# EAGLE board Graphic_LCD_Backpack_Panel_v16 (EAGLE 7.5.0), part 1 of 4
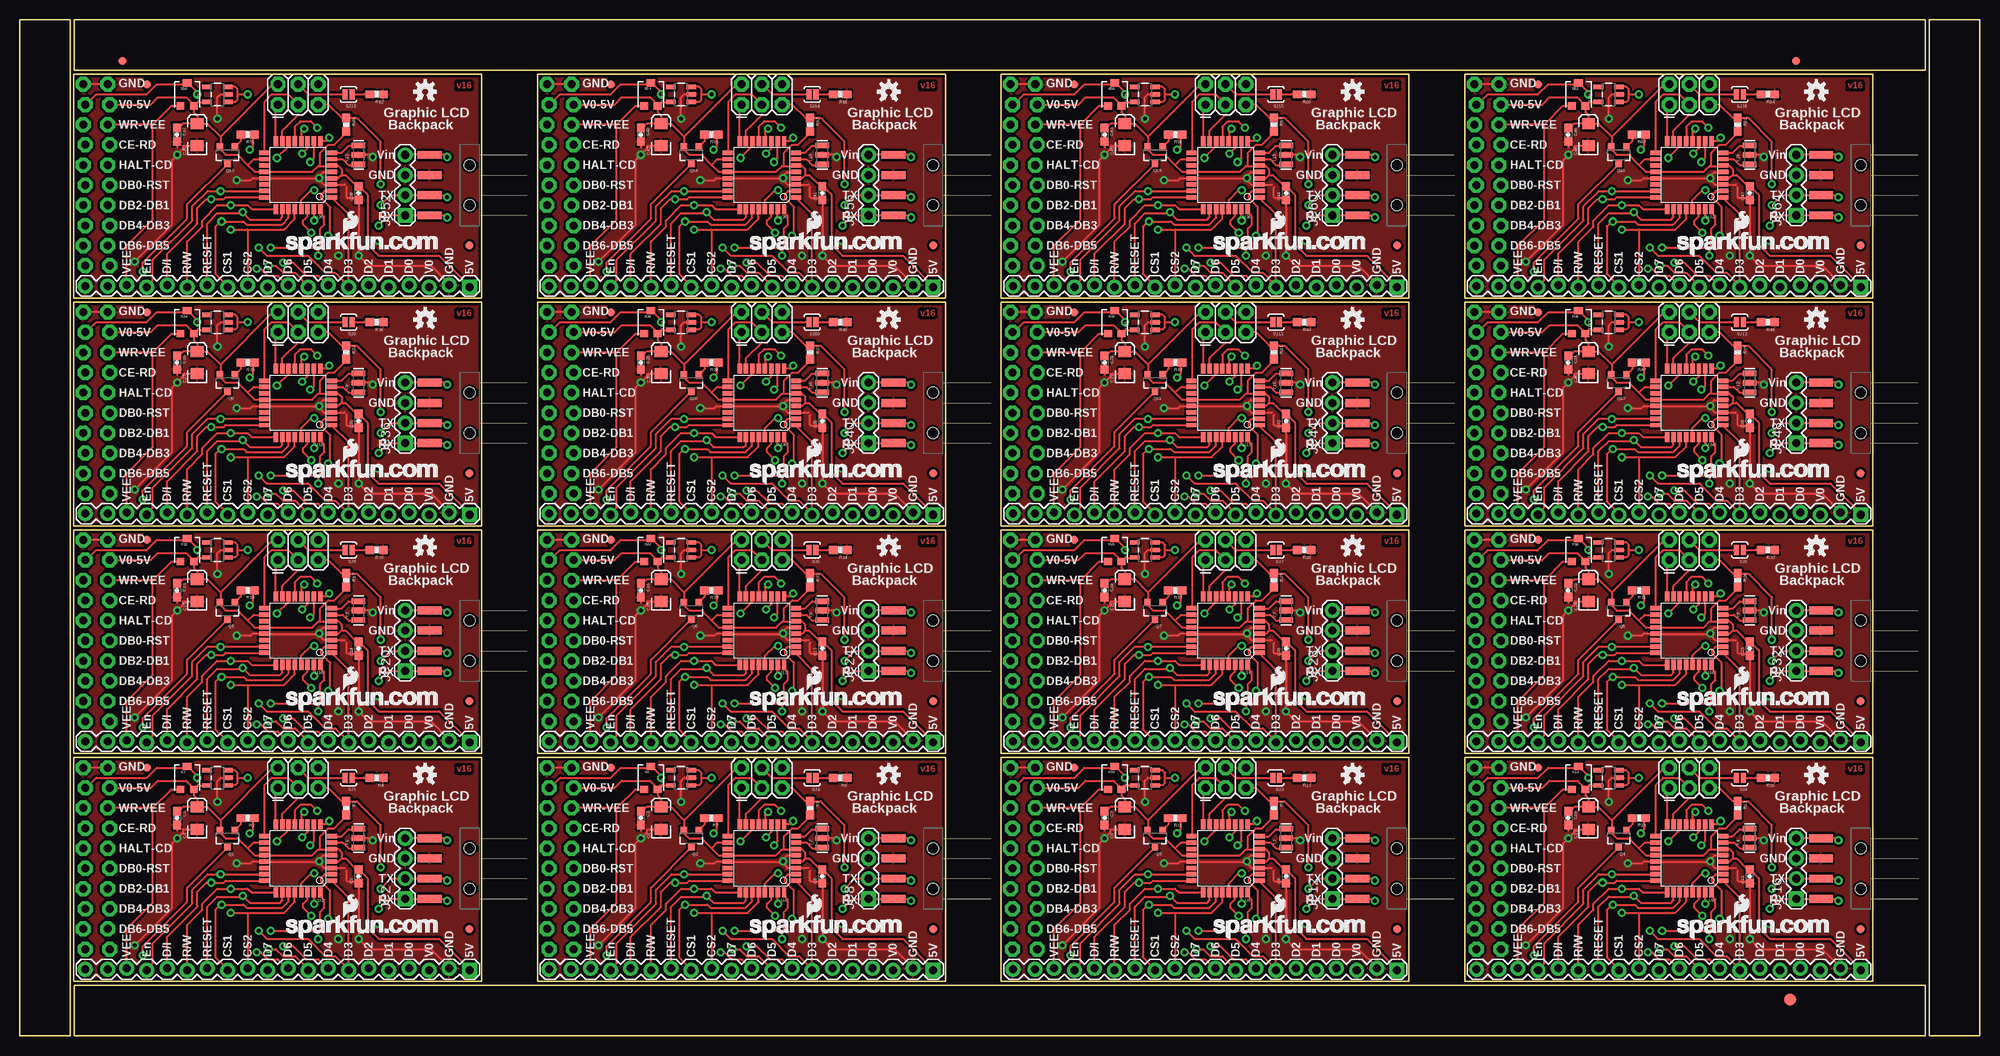
[diagram p0: board, top side]
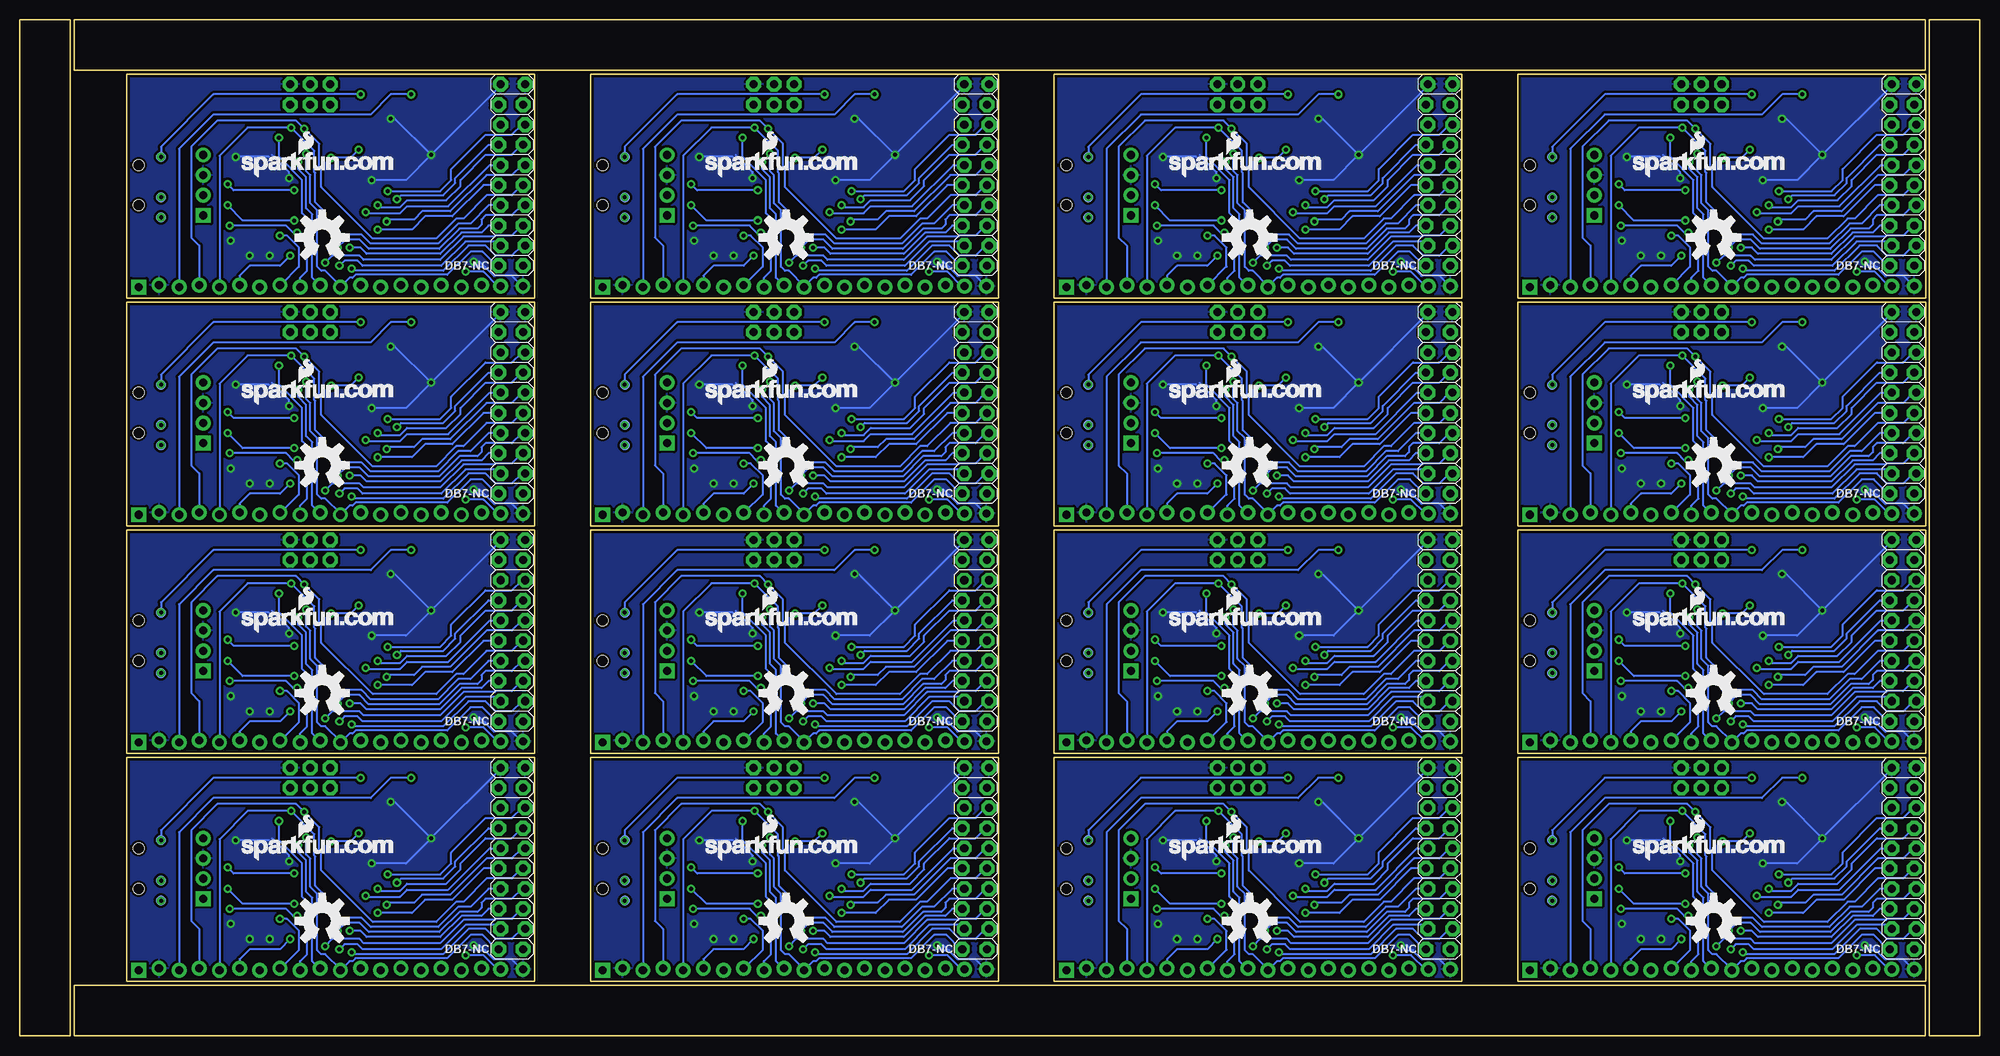
[diagram p1: board, bottom side, seen from below]

Size 246.89 x 128.02 mm. Coordinates in mm from the lower left corner, seen from the top.
Outline: 6.35,79.25 6.35,0 0,0 0,29.72
Outline: 0,27.18 0,128.02 6.35,128.02 6.35,76.71
Outline: 79.25,0 6.86,0 6.86,6.35 29.72,6.35
Outline: 27.18,6.35 240.03,6.35 240.03,0 76.71,0
Outline: 246.89,79.25 246.89,0 240.54,0 240.54,29.72
Outline: 240.54,27.18 240.54,128.02 246.89,128.02 246.89,76.71
Outline: 161.04,128.02 240.03,128.02 240.03,121.67 210.57,121.67
Outline: 213.11,121.67 6.86,121.67 6.86,128.02 163.58,128.02
Outline: 6.78,6.86 6.78,35.05 58.17,35.05 58.17,6.86 6.78,6.86
Outline: 65.2,6.86 65.2,35.05 116.59,35.05 116.59,6.86 65.2,6.86
Outline: 123.62,6.86 123.62,35.05 175.01,35.05 175.01,6.86 123.62,6.86
Outline: 182.04,6.86 182.04,35.05 233.43,35.05 233.43,6.86 182.04,6.86
Outline: 6.78,35.56 6.78,63.75 58.17,63.75 58.17,35.56 6.78,35.56
Outline: 65.2,35.56 65.2,63.75 116.59,63.75 116.59,35.56 65.2,35.56
Outline: 123.62,35.56 123.62,63.75 175.01,63.75 175.01,35.56 123.62,35.56
Outline: 182.04,35.56 182.04,63.75 233.43,63.75 233.43,35.56 182.04,35.56
Outline: 6.78,64.26 6.78,92.46 58.17,92.46 58.17,64.26 6.78,64.26
Outline: 65.2,64.26 65.2,92.46 116.59,92.46 116.59,64.26 65.2,64.26
Outline: 123.62,64.26 123.62,92.46 175.01,92.46 175.01,64.26 123.62,64.26
Outline: 182.04,64.26 182.04,92.46 233.43,92.46 233.43,64.26 182.04,64.26
Outline: 6.78,92.96 6.78,121.16 58.17,121.16 58.17,92.96 6.78,92.96
Outline: 65.2,92.96 65.2,121.16 116.59,121.16 116.59,92.96 65.2,92.96
Outline: 123.62,92.96 123.62,121.16 175.01,121.16 175.01,92.96 123.62,92.96
Outline: 182.04,92.96 182.04,121.16 233.43,121.16 233.43,92.96 182.04,92.96
Copper layers (1*16): Top 0.035mm / dielectric 1.5mm / Bottom 0.035mm
Design rules "SparkFun *": minimum track width 8mil, minimum drill 20mil, track to track 8mil, track to pad 8mil, pad to pad 8mil, via to via 8mil, smd to smd 6mil, copper to edge 8mil, drill to drill 8mil, minimum pad ring 12mil, minimum via ring 10mil, stop-mask expansion 4mil, vias tented up to drill 25mil, thermal gap 10mil

## Footprints (pad centres in the part's own frame; a part is rotated, then mirrored left to right if it is on the bottom)
0603-CAP = smd 1.1 x 1: 1 -0.85,0; 2 0.85,0
EIA3216 = smd 1.4 x 1.6: A 1.4,0; C -1.4,0
FIDUCIAL-1.5X3 = smd 1.5 x 1.5: 1 0,0
FIDUCIAL-1X2 = smd 1 x 1: 1 0,0
1X04-SMD = smd 1 x 3: 1 -3.81,5; 2 -1.27,5; 3 1.27,5; 4 3.81,5 | hole 1.4: -2.54,0; 2.54,0
1X04 = drill 1.016 pad 1.88 square: 1 0,0 | drill 1.016 pad 1.88: 2 2.54,0; 3 5.08,0; 4 7.62,0
1X20_LOCK_SPECIAL = drill 1.016 pad 1.88 square: 1 0,0.127 | drill 1.016 pad 1.88: 2 2.54,-0.127; 3 5.08,0.127; 4 7.62,-0.127; 5 10.16,0.127; 6 12.7,-0.127; 7 15.24,0.127; 8 17.78,-0.127; 9 20.32,0.127; 10 22.86,-0.127; 11 25.4,0.127; 12 27.94,-0.127; 13 30.48,0.127; 14 33.02,-0.127; 15 35.56,0.127; 16 38.1,-0.127; 17 40.64,0.127; 18 43.18,-0.127; 19 45.593,0; 20 48.387,0
2X10_LOCK_SPECIAL = drill 1.016 pad 1.88 octagon: 1 -11.43,-1.422; 2 -11.43,1.676; 3 -8.89,-1.676; 4 -8.89,1.422; 5 -6.35,-1.422; 6 -6.35,1.676; 7 -3.81,-1.676; 8 -3.81,1.422; 9 -1.27,-1.422; 10 -1.27,1.676; 11 1.27,-1.676; 12 1.27,1.422; 13 3.81,-1.422; 14 3.81,1.676; 15 6.35,-1.676; 16 6.35,1.422; 17 8.89,-1.422; 18 8.89,1.676; 19 11.43,-1.676; 20 11.43,1.422
SOT23-3 = smd 0.8 x 0.9: 1 -0.95,-1; 2 0.95,-1; 3 0,1.1
0603-RES = smd 1.1 x 1: 1 -0.85,0; 2 0.85,0
TRIMPOT-3MM = smd 1 x 0.9: 1 -0.85,-1.45; 3 0.85,-1.45 | smd 1.1 x 0.9: 2 0,1.45
SJ_2S-NOTRACE = smd 0.635 x 1.27: 1 -0.45,0; 2 0.4,0
PAD.03X.05 = smd 1.27 x 1.27: P$1 0,0
SOT23-5 = smd 0.55 x 1.2: 1 -0.95,-1.3; 2 0,-1.3; 3 0.95,-1.3; 4 0.95,1.3; 5 -0.95,1.3
TQFP32-08 = smd 1.27 x 0.559: 1 -4.293,2.8; 2 -4.293,2; 3 -4.293,1.2; 4 -4.293,0.4; 5 -4.293,-0.4; 6 -4.293,-1.2; 7 -4.293,-2; 8 -4.293,-2.8; 17 4.293,-2.8; 18 4.293,-2; 19 4.293,-1.2; 20 4.293,-0.4; 21 4.293,0.4; 22 4.293,1.2; 23 4.293,2; 24 4.293,2.8 | smd 0.559 x 1.27: 9 -2.8,-4.293; 10 -2,-4.293; 11 -1.2,-4.293; 12 -0.4,-4.293; 13 0.4,-4.293; 14 1.2,-4.293; 15 2,-4.293; 16 2.8,-4.293; 25 2.8,4.293; 26 2,4.293; 27 1.2,4.293; 28 0.4,4.293; 29 -0.4,4.293; 30 -1.2,4.293; 31 -2,4.293; 32 -2.8,4.293
2X3 = drill 1.016 pad 1.88 octagon: 1 0,0; 2 0,2.54; 3 2.54,0; 4 2.54,2.54; 5 5.08,0; 6 5.08,2.54
RESONATOR-SMD = smd 0.7 x 1.7: 1 -1.2,0; 2 0,0; 3 1.2,0

## Placement (x,y rotation side)
C1  0.1uF  [0603-CAP]  19.81,27.43 270 top
C2  0.1uF  [0603-CAP]  42.67,20.08 90 top
C3  0.1uF  [0603-CAP]  78.23,27.43 270 top
C4  10uF  [EIA3216]  22.35,27.43 90 top
C5  0.1uF  [0603-CAP]  101.09,20.08 90 top
C6  10uF  [EIA3216]  80.77,27.43 90 top
C7  0.1uF  [0603-CAP]  136.65,27.43 270 top
C8  0.1uF  [0603-CAP]  159.51,20.08 90 top
C9  10uF  [EIA3216]  139.19,27.43 90 top
C10  0.1uF  [0603-CAP]  195.07,27.43 270 top
C11  0.1uF  [0603-CAP]  217.93,20.08 90 top
C12  10uF  [EIA3216]  197.61,27.43 90 top
C13  0.1uF  [0603-CAP]  19.81,56.13 270 top
C14  0.1uF  [0603-CAP]  42.67,48.78 90 top
C15  10uF  [EIA3216]  22.35,56.13 90 top
C16  0.1uF  [0603-CAP]  78.23,56.13 270 top
C17  0.1uF  [0603-CAP]  101.09,48.78 90 top
C18  10uF  [EIA3216]  80.77,56.13 90 top
C19  0.1uF  [0603-CAP]  136.65,56.13 270 top
C20  0.1uF  [0603-CAP]  159.51,48.78 90 top
C21  10uF  [EIA3216]  139.19,56.13 90 top
C22  0.1uF  [0603-CAP]  195.07,56.13 270 top
C23  0.1uF  [0603-CAP]  217.93,48.78 90 top
C24  10uF  [EIA3216]  197.61,56.13 90 top
C25  0.1uF  [0603-CAP]  19.81,84.84 270 top
C26  0.1uF  [0603-CAP]  42.67,77.49 90 top
C27  10uF  [EIA3216]  22.35,84.84 90 top
C28  0.1uF  [0603-CAP]  78.23,84.84 270 top
C29  0.1uF  [0603-CAP]  101.09,77.49 90 top
C30  10uF  [EIA3216]  80.77,84.84 90 top
C31  0.1uF  [0603-CAP]  136.65,84.84 270 top
C32  0.1uF  [0603-CAP]  159.51,77.49 90 top
C33  10uF  [EIA3216]  139.19,84.84 90 top
C34  0.1uF  [0603-CAP]  195.07,84.84 270 top
C35  0.1uF  [0603-CAP]  217.93,77.49 90 top
C36  10uF  [EIA3216]  197.61,84.84 90 top
C37  0.1uF  [0603-CAP]  19.81,113.54 270 top
C38  0.1uF  [0603-CAP]  42.67,106.19 90 top
C39  10uF  [EIA3216]  22.35,113.54 90 top
C40  0.1uF  [0603-CAP]  78.23,113.54 270 top
C41  0.1uF  [0603-CAP]  101.09,106.19 90 top
C42  10uF  [EIA3216]  80.77,113.54 90 top
C43  0.1uF  [0603-CAP]  136.65,113.54 270 top
C44  0.1uF  [0603-CAP]  159.51,106.19 90 top
C45  10uF  [EIA3216]  139.19,113.54 90 top
C46  0.1uF  [0603-CAP]  195.07,113.54 270 top
C47  0.1uF  [0603-CAP]  217.93,106.19 90 top
C48  10uF  [EIA3216]  197.61,113.54 90 top
E$1  [FIDUCIAL-1.5X3]  223.01,4.57 0 top
E$7  [FIDUCIAL-1X2]  223.77,122.81 90 top
E$8  [FIDUCIAL-1X2]  12.95,122.81 270 top
JP1  [1X04-SMD]  56.64,21.08 90 top
JP2  [1X04]  48.51,17.27 90 top
JP3  M20SPECIAL  [1X20_LOCK_SPECIAL]  56.64,8.38 180 top
JP4  M10X2SPECIAL  [2X10_LOCK_SPECIAL]  9.65,22.35 270 bottom
JP5  M20SPECIAL  [1X20_LOCK_SPECIAL]  115.06,8.38 180 top
JP6  M10X2SPECIAL  [2X10_LOCK_SPECIAL]  68.07,22.35 270 bottom
JP7  [1X04-SMD]  115.06,21.08 90 top
JP8  [1X04]  106.93,17.27 90 top
JP9  M20SPECIAL  [1X20_LOCK_SPECIAL]  173.48,8.38 180 top
JP10  M10X2SPECIAL  [2X10_LOCK_SPECIAL]  126.49,22.35 270 bottom
JP11  [1X04-SMD]  173.48,21.08 90 top
JP12  [1X04]  165.35,17.27 90 top
JP13  M20SPECIAL  [1X20_LOCK_SPECIAL]  231.9,8.38 180 top
JP14  M10X2SPECIAL  [2X10_LOCK_SPECIAL]  184.91,22.35 270 bottom
JP15  [1X04-SMD]  231.9,21.08 90 top
JP16  [1X04]  223.77,17.27 90 top
JP17  M20SPECIAL  [1X20_LOCK_SPECIAL]  56.64,37.08 180 top
JP18  M10X2SPECIAL  [2X10_LOCK_SPECIAL]  9.65,51.05 270 bottom
JP19  [1X04-SMD]  56.64,49.78 90 top
JP20  [1X04]  48.51,45.97 90 top
JP21  M20SPECIAL  [1X20_LOCK_SPECIAL]  115.06,37.08 180 top
JP22  M10X2SPECIAL  [2X10_LOCK_SPECIAL]  68.07,51.05 270 bottom
JP23  [1X04-SMD]  115.06,49.78 90 top
JP24  [1X04]  106.93,45.97 90 top
JP25  M20SPECIAL  [1X20_LOCK_SPECIAL]  173.48,37.08 180 top
JP26  M10X2SPECIAL  [2X10_LOCK_SPECIAL]  126.49,51.05 270 bottom
JP27  [1X04-SMD]  173.48,49.78 90 top
JP28  [1X04]  165.35,45.97 90 top
JP29  M20SPECIAL  [1X20_LOCK_SPECIAL]  231.9,37.08 180 top
JP30  M10X2SPECIAL  [2X10_LOCK_SPECIAL]  184.91,51.05 270 bottom
JP31  [1X04-SMD]  231.9,49.78 90 top
JP32  [1X04]  223.77,45.97 90 top
JP33  M20SPECIAL  [1X20_LOCK_SPECIAL]  56.64,65.79 180 top
JP34  M10X2SPECIAL  [2X10_LOCK_SPECIAL]  9.65,79.76 270 bottom
JP35  [1X04-SMD]  56.64,78.49 90 top
JP36  [1X04]  48.51,74.68 90 top
JP37  M20SPECIAL  [1X20_LOCK_SPECIAL]  115.06,65.79 180 top
JP38  M10X2SPECIAL  [2X10_LOCK_SPECIAL]  68.07,79.76 270 bottom
JP39  [1X04-SMD]  115.06,78.49 90 top
JP40  [1X04]  106.93,74.68 90 top
JP41  M20SPECIAL  [1X20_LOCK_SPECIAL]  173.48,65.79 180 top
JP42  M10X2SPECIAL  [2X10_LOCK_SPECIAL]  126.49,79.76 270 bottom
JP43  [1X04-SMD]  173.48,78.49 90 top
JP44  [1X04]  165.35,74.68 90 top
JP45  M20SPECIAL  [1X20_LOCK_SPECIAL]  231.9,65.79 180 top
JP46  M10X2SPECIAL  [2X10_LOCK_SPECIAL]  184.91,79.76 270 bottom
JP47  [1X04-SMD]  231.9,78.49 90 top
JP48  [1X04]  223.77,74.68 90 top
JP49  M20SPECIAL  [1X20_LOCK_SPECIAL]  56.64,94.49 180 top
JP50  M10X2SPECIAL  [2X10_LOCK_SPECIAL]  9.65,108.46 270 bottom
JP51  [1X04-SMD]  56.64,107.19 90 top
JP52  [1X04]  48.51,103.38 90 top
JP53  M20SPECIAL  [1X20_LOCK_SPECIAL]  115.06,94.49 180 top
JP54  M10X2SPECIAL  [2X10_LOCK_SPECIAL]  68.07,108.46 270 bottom
JP55  [1X04-SMD]  115.06,107.19 90 top
JP56  [1X04]  106.93,103.38 90 top
JP57  M20SPECIAL  [1X20_LOCK_SPECIAL]  173.48,94.49 180 top
JP58  M10X2SPECIAL  [2X10_LOCK_SPECIAL]  126.49,108.46 270 bottom
JP59  [1X04-SMD]  173.48,107.19 90 top
JP60  [1X04]  165.35,103.38 90 top
JP61  M20SPECIAL  [1X20_LOCK_SPECIAL]  231.9,94.49 180 top
JP62  M10X2SPECIAL  [2X10_LOCK_SPECIAL]  184.91,108.46 270 bottom
JP63  [1X04-SMD]  231.9,107.19 90 top
JP64  [1X04]  223.77,103.38 90 top
LOGO1  OSHW-LOGOL  [OSHW-LOGO-L]  33.53,14.48 0 bottom
LOGO2  LOGO-SFENEW  [SFE-NEW-WEBLOGO]  43.69,22.1 0 bottom
LOGO3  OSHW-LOGOS  [OSHW-LOGO-S]  51.05,32.86 0 top
LOGO4  OSHW-LOGOL  [OSHW-LOGO-L]  91.95,14.48 0 bottom
LOGO5  LOGO-SFENEW  [SFE-NEW-WEBLOGO]  102.11,22.1 0 bottom
LOGO6  OSHW-LOGOS  [OSHW-LOGO-S]  109.47,32.86 0 top
LOGO7  OSHW-LOGOL  [OSHW-LOGO-L]  150.37,14.48 0 bottom
LOGO8  LOGO-SFENEW  [SFE-NEW-WEBLOGO]  160.53,22.1 0 bottom
LOGO9  OSHW-LOGOS  [OSHW-LOGO-S]  167.89,32.86 0 top
LOGO10  OSHW-LOGOL  [OSHW-LOGO-L]  208.79,14.48 0 bottom
LOGO11  LOGO-SFENEW  [SFE-NEW-WEBLOGO]  218.95,22.1 0 bottom
LOGO12  OSHW-LOGOS  [OSHW-LOGO-S]  226.31,32.86 0 top
LOGO13  OSHW-LOGOL  [OSHW-LOGO-L]  33.53,43.18 0 bottom
LOGO14  LOGO-SFENEW  [SFE-NEW-WEBLOGO]  43.69,50.8 0 bottom
LOGO15  OSHW-LOGOS  [OSHW-LOGO-S]  51.05,61.56 0 top
LOGO16  OSHW-LOGOL  [OSHW-LOGO-L]  91.95,43.18 0 bottom
LOGO17  LOGO-SFENEW  [SFE-NEW-WEBLOGO]  102.11,50.8 0 bottom
LOGO18  OSHW-LOGOS  [OSHW-LOGO-S]  109.47,61.56 0 top
LOGO19  OSHW-LOGOL  [OSHW-LOGO-L]  150.37,43.18 0 bottom
LOGO20  LOGO-SFENEW  [SFE-NEW-WEBLOGO]  160.53,50.8 0 bottom
LOGO21  OSHW-LOGOS  [OSHW-LOGO-S]  167.89,61.56 0 top
LOGO22  OSHW-LOGOL  [OSHW-LOGO-L]  208.79,43.18 0 bottom
LOGO23  LOGO-SFENEW  [SFE-NEW-WEBLOGO]  218.95,50.8 0 bottom
LOGO24  OSHW-LOGOS  [OSHW-LOGO-S]  226.31,61.56 0 top
LOGO25  OSHW-LOGOL  [OSHW-LOGO-L]  33.53,71.88 0 bottom
LOGO26  LOGO-SFENEW  [SFE-NEW-WEBLOGO]  43.69,79.5 0 bottom
LOGO27  OSHW-LOGOS  [OSHW-LOGO-S]  51.05,90.26 0 top
LOGO28  OSHW-LOGOL  [OSHW-LOGO-L]  91.95,71.88 0 bottom
LOGO29  LOGO-SFENEW  [SFE-NEW-WEBLOGO]  102.11,79.5 0 bottom
LOGO30  OSHW-LOGOS  [OSHW-LOGO-S]  109.47,90.26 0 top
LOGO31  OSHW-LOGOL  [OSHW-LOGO-L]  150.37,71.88 0 bottom
LOGO32  LOGO-SFENEW  [SFE-NEW-WEBLOGO]  160.53,79.5 0 bottom
LOGO33  OSHW-LOGOS  [OSHW-LOGO-S]  167.89,90.26 0 top
LOGO34  OSHW-LOGOL  [OSHW-LOGO-L]  208.79,71.88 0 bottom
LOGO35  LOGO-SFENEW  [SFE-NEW-WEBLOGO]  218.95,79.5 0 bottom
LOGO36  OSHW-LOGOS  [OSHW-LOGO-S]  226.31,90.26 0 top
LOGO37  OSHW-LOGOL  [OSHW-LOGO-L]  33.53,100.58 0 bottom
LOGO38  LOGO-SFENEW  [SFE-NEW-WEBLOGO]  43.69,108.2 0 bottom
LOGO39  OSHW-LOGOS  [OSHW-LOGO-S]  51.05,118.96 0 top
LOGO40  OSHW-LOGOL  [OSHW-LOGO-L]  91.95,100.58 0 bottom
LOGO41  LOGO-SFENEW  [SFE-NEW-WEBLOGO]  102.11,108.2 0 bottom
LOGO42  OSHW-LOGOS  [OSHW-LOGO-S]  109.47,118.96 0 top
LOGO43  OSHW-LOGOL  [OSHW-LOGO-L]  150.37,100.58 0 bottom
LOGO44  LOGO-SFENEW  [SFE-NEW-WEBLOGO]  160.53,108.2 0 bottom
LOGO45  OSHW-LOGOS  [OSHW-LOGO-S]  167.89,118.96 0 top
LOGO46  OSHW-LOGOL  [OSHW-LOGO-L]  208.79,100.58 0 bottom
LOGO47  LOGO-SFENEW  [SFE-NEW-WEBLOGO]  218.95,108.2 0 bottom
LOGO48  OSHW-LOGOS  [OSHW-LOGO-S]  226.31,118.96 0 top
Q1  TRANSISTOR_PNPSMD  [SOT23-3]  26.16,24.89 180 top
Q2  TRANSISTOR_PNPSMD  [SOT23-3]  84.58,24.89 180 top
Q3  TRANSISTOR_PNPSMD  [SOT23-3]  143,24.89 180 top
Q4  TRANSISTOR_PNPSMD  [SOT23-3]  201.42,24.89 180 top
Q5  TRANSISTOR_PNPSMD  [SOT23-3]  26.16,53.59 180 top
Q6  TRANSISTOR_PNPSMD  [SOT23-3]  84.58,53.59 180 top
Q7  TRANSISTOR_PNPSMD  [SOT23-3]  143,53.59 180 top
Q8  TRANSISTOR_PNPSMD  [SOT23-3]  201.42,53.59 180 top
Q9  TRANSISTOR_PNPSMD  [SOT23-3]  26.16,82.3 180 top
Q10  TRANSISTOR_PNPSMD  [SOT23-3]  84.58,82.3 180 top
Q11  TRANSISTOR_PNPSMD  [SOT23-3]  143,82.3 180 top
Q12  TRANSISTOR_PNPSMD  [SOT23-3]  201.42,82.3 180 top
Q13  TRANSISTOR_PNPSMD  [SOT23-3]  26.16,111 180 top
Q14  TRANSISTOR_PNPSMD  [SOT23-3]  84.58,111 180 top
Q15  TRANSISTOR_PNPSMD  [SOT23-3]  143,111 180 top
Q16  TRANSISTOR_PNPSMD  [SOT23-3]  201.42,111 180 top
R1  10K  [0603-RES]  41.13,28.7 270 top
R2  330  [0603-RES]  28.7,27.43 180 top
R3  TRIMPOTSMD  [TRIMPOT-3MM]  21.08,32.51 0 top
R4  4.7K  [0603-RES]  44.94,32.51 180 top
R5  10K  [0603-RES]  99.55,28.7 270 top
R6  TRIMPOTSMD  [TRIMPOT-3MM]  79.5,32.51 0 top
R7  330  [0603-RES]  87.12,27.43 180 top
R8  4.7K  [0603-RES]  103.36,32.51 180 top
R9  10K  [0603-RES]  157.97,28.7 270 top
R10  TRIMPOTSMD  [TRIMPOT-3MM]  137.92,32.51 0 top
R11  330  [0603-RES]  145.54,27.43 180 top
R12  4.7K  [0603-RES]  161.78,32.51 180 top
R13  10K  [0603-RES]  216.39,28.7 270 top
R14  TRIMPOTSMD  [TRIMPOT-3MM]  196.34,32.51 0 top
R15  330  [0603-RES]  203.96,27.43 180 top
R16  4.7K  [0603-RES]  220.2,32.51 180 top
R17  10K  [0603-RES]  41.13,57.4 270 top
R18  TRIMPOTSMD  [TRIMPOT-3MM]  21.08,61.21 0 top
R19  330  [0603-RES]  28.7,56.13 180 top
R20  4.7K  [0603-RES]  44.94,61.21 180 top
R21  10K  [0603-RES]  99.55,57.4 270 top
R22  TRIMPOTSMD  [TRIMPOT-3MM]  79.5,61.21 0 top
R23  330  [0603-RES]  87.12,56.13 180 top
R24  4.7K  [0603-RES]  103.36,61.21 180 top
R25  10K  [0603-RES]  157.97,57.4 270 top
R26  TRIMPOTSMD  [TRIMPOT-3MM]  137.92,61.21 0 top
R27  330  [0603-RES]  145.54,56.13 180 top
R28  4.7K  [0603-RES]  161.78,61.21 180 top
R29  10K  [0603-RES]  216.39,57.4 270 top
R30  TRIMPOTSMD  [TRIMPOT-3MM]  196.34,61.21 0 top
R31  330  [0603-RES]  203.96,56.13 180 top
R32  4.7K  [0603-RES]  220.2,61.21 180 top
R33  10K  [0603-RES]  41.13,86.11 270 top
R34  TRIMPOTSMD  [TRIMPOT-3MM]  21.08,89.92 0 top
R35  330  [0603-RES]  28.7,84.84 180 top
R36  4.7K  [0603-RES]  44.94,89.92 180 top
R37  10K  [0603-RES]  99.55,86.11 270 top
R38  TRIMPOTSMD  [TRIMPOT-3MM]  79.5,89.92 0 top
R39  330  [0603-RES]  87.12,84.84 180 top
R40  4.7K  [0603-RES]  103.36,89.92 180 top
R41  10K  [0603-RES]  157.97,86.11 270 top
R42  TRIMPOTSMD  [TRIMPOT-3MM]  137.92,89.92 0 top
R43  330  [0603-RES]  145.54,84.84 180 top
R44  4.7K  [0603-RES]  161.78,89.92 180 top
R45  10K  [0603-RES]  216.39,86.11 270 top
R46  TRIMPOTSMD  [TRIMPOT-3MM]  196.34,89.92 0 top
R47  330  [0603-RES]  203.96,84.84 180 top
R48  4.7K  [0603-RES]  220.2,89.92 180 top
R49  10K  [0603-RES]  41.13,114.81 270 top
R50  TRIMPOTSMD  [TRIMPOT-3MM]  21.08,118.62 0 top
R51  330  [0603-RES]  28.7,113.54 180 top
R52  4.7K  [0603-RES]  44.94,118.62 180 top
R53  10K  [0603-RES]  99.55,114.81 270 top
R54  TRIMPOTSMD  [TRIMPOT-3MM]  79.5,118.62 0 top
R55  330  [0603-RES]  87.12,113.54 180 top
R56  4.7K  [0603-RES]  103.36,118.62 180 top
R57  10K  [0603-RES]  157.97,114.81 270 top
R58  TRIMPOTSMD  [TRIMPOT-3MM]  137.92,118.62 0 top
R59  330  [0603-RES]  145.54,113.54 180 top
R60  4.7K  [0603-RES]  161.78,118.62 180 top
R61  10K  [0603-RES]  216.39,114.81 270 top
R62  TRIMPOTSMD  [TRIMPOT-3MM]  196.34,118.62 0 top
R63  330  [0603-RES]  203.96,113.54 180 top
R64  4.7K  [0603-RES]  220.2,118.62 180 top
SJ1  SOLDERJUMPERNC2  [SJ_2S-NOTRACE]  41.4,32.51 180 top
SJ2  SOLDERJUMPERNC2  [SJ_2S-NOTRACE]  99.82,32.51 180 top
SJ3  SOLDERJUMPERNC2  [SJ_2S-NOTRACE]  158.24,32.51 180 top
SJ4  SOLDERJUMPERNC2  [SJ_2S-NOTRACE]  216.66,32.51 180 top
SJ5  SOLDERJUMPERNC2  [SJ_2S-NOTRACE]  41.4,61.21 180 top
SJ6  SOLDERJUMPERNC2  [SJ_2S-NOTRACE]  99.82,61.21 180 top
SJ7  SOLDERJUMPERNC2  [SJ_2S-NOTRACE]  158.24,61.21 180 top
SJ8  SOLDERJUMPERNC2  [SJ_2S-NOTRACE]  216.66,61.21 180 top
SJ9  SOLDERJUMPERNC2  [SJ_2S-NOTRACE]  41.4,89.92 180 top
SJ10  SOLDERJUMPERNC2  [SJ_2S-NOTRACE]  99.82,89.92 180 top
SJ11  SOLDERJUMPERNC2  [SJ_2S-NOTRACE]  158.24,89.92 180 top
SJ12  SOLDERJUMPERNC2  [SJ_2S-NOTRACE]  216.66,89.92 180 top
SJ13  SOLDERJUMPERNC2  [SJ_2S-NOTRACE]  41.4,118.62 180 top
SJ14  SOLDERJUMPERNC2  [SJ_2S-NOTRACE]  99.82,118.62 180 top
SJ15  SOLDERJUMPERNC2  [SJ_2S-NOTRACE]  158.24,118.62 180 top
SJ16  SOLDERJUMPERNC2  [SJ_2S-NOTRACE]  216.66,118.62 180 top
TP1  RXD  [PAD.03X.05]  53.85,17.02 0 bottom
TP2  TXD  [PAD.03X.05]  53.85,19.56 0 bottom
TP3  VIN  [PAD.03X.05]  53.85,24.64 0 bottom
TP4  RXD  [PAD.03X.05]  112.27,17.02 0 bottom
TP5  TXD  [PAD.03X.05]  112.27,19.56 0 bottom
TP6  VIN  [PAD.03X.05]  112.27,24.64 0 bottom
TP7  RXD  [PAD.03X.05]  170.69,17.02 0 bottom
TP8  TXD  [PAD.03X.05]  170.69,19.56 0 bottom
TP9  VIN  [PAD.03X.05]  170.69,24.64 0 bottom
TP10  RXD  [PAD.03X.05]  229.11,17.02 0 bottom
TP11  TXD  [PAD.03X.05]  229.11,19.56 0 bottom
TP12  VIN  [PAD.03X.05]  229.11,24.64 0 bottom
TP13  RXD  [PAD.03X.05]  53.85,45.72 0 bottom
TP14  TXD  [PAD.03X.05]  53.85,48.26 0 bottom
TP15  VIN  [PAD.03X.05]  53.85,53.34 0 bottom
TP16  RXD  [PAD.03X.05]  112.27,45.72 0 bottom
TP17  TXD  [PAD.03X.05]  112.27,48.26 0 bottom
TP18  VIN  [PAD.03X.05]  112.27,53.34 0 bottom
TP19  RXD  [PAD.03X.05]  170.69,45.72 0 bottom
TP20  TXD  [PAD.03X.05]  170.69,48.26 0 bottom
TP21  VIN  [PAD.03X.05]  170.69,53.34 0 bottom
TP22  RXD  [PAD.03X.05]  229.11,45.72 0 bottom
TP23  TXD  [PAD.03X.05]  229.11,48.26 0 bottom
TP24  VIN  [PAD.03X.05]  229.11,53.34 0 bottom
TP25  RXD  [PAD.03X.05]  53.85,74.42 0 bottom
TP26  TXD  [PAD.03X.05]  53.85,76.96 0 bottom
TP27  VIN  [PAD.03X.05]  53.85,82.04 0 bottom
TP28  RXD  [PAD.03X.05]  112.27,74.42 0 bottom
TP29  TXD  [PAD.03X.05]  112.27,76.96 0 bottom
TP30  VIN  [PAD.03X.05]  112.27,82.04 0 bottom
TP31  RXD  [PAD.03X.05]  170.69,74.42 0 bottom
TP32  TXD  [PAD.03X.05]  170.69,76.96 0 bottom
TP33  VIN  [PAD.03X.05]  170.69,82.04 0 bottom
TP34  RXD  [PAD.03X.05]  229.11,74.42 0 bottom
TP35  TXD  [PAD.03X.05]  229.11,76.96 0 bottom
TP36  VIN  [PAD.03X.05]  229.11,82.04 0 bottom
TP37  RXD  [PAD.03X.05]  53.85,103.12 0 bottom
TP38  TXD  [PAD.03X.05]  53.85,105.66 0 bottom
TP39  VIN  [PAD.03X.05]  53.85,110.74 0 bottom
TP40  RXD  [PAD.03X.05]  112.27,103.12 0 bottom
TP41  TXD  [PAD.03X.05]  112.27,105.66 0 bottom
TP42  VIN  [PAD.03X.05]  112.27,110.74 0 bottom
TP43  RXD  [PAD.03X.05]  170.69,103.12 0 bottom
TP44  TXD  [PAD.03X.05]  170.69,105.66 0 bottom
TP45  VIN  [PAD.03X.05]  170.69,110.74 0 bottom
TP46  RXD  [PAD.03X.05]  229.11,103.12 0 bottom
TP47  TXD  [PAD.03X.05]  229.11,105.66 0 bottom
TP48  VIN  [PAD.03X.05]  229.11,110.74 0 bottom
U1  V_REG_LDOSMD  [SOT23-5]  24.89,32.51 90 top
U2  ATMEGA168  [TQFP32-08]  35.05,22.35 180 top
U3  V_REG_LDOSMD  [SOT23-5]  83.31,32.51 90 top
U4  ATMEGA168  [TQFP32-08]  93.47,22.35 180 top
U5  V_REG_LDOSMD  [SOT23-5]  141.73,32.51 90 top
U6  ATMEGA168  [TQFP32-08]  151.89,22.35 180 top
U7  V_REG_LDOSMD  [SOT23-5]  200.15,32.51 90 top
U8  ATMEGA168  [TQFP32-08]  210.31,22.35 180 top
U9  V_REG_LDOSMD  [SOT23-5]  24.89,61.21 90 top
U10  ATMEGA168  [TQFP32-08]  35.05,51.05 180 top
U11  V_REG_LDOSMD  [SOT23-5]  83.31,61.21 90 top
U12  ATMEGA168  [TQFP32-08]  93.47,51.05 180 top
U13  V_REG_LDOSMD  [SOT23-5]  141.73,61.21 90 top
U14  ATMEGA168  [TQFP32-08]  151.89,51.05 180 top
U15  V_REG_LDOSMD  [SOT23-5]  200.15,61.21 90 top
U16  ATMEGA168  [TQFP32-08]  210.31,51.05 180 top
U17  V_REG_LDOSMD  [SOT23-5]  24.89,89.92 90 top
U18  ATMEGA168  [TQFP32-08]  35.05,79.76 180 top
U19  V_REG_LDOSMD  [SOT23-5]  83.31,89.92 90 top
U20  ATMEGA168  [TQFP32-08]  93.47,79.76 180 top
U21  V_REG_LDOSMD  [SOT23-5]  141.73,89.92 90 top
U22  ATMEGA168  [TQFP32-08]  151.89,79.76 180 top
U23  V_REG_LDOSMD  [SOT23-5]  200.15,89.92 90 top
U24  ATMEGA168  [TQFP32-08]  210.31,79.76 180 top
U25  V_REG_LDOSMD  [SOT23-5]  24.89,118.62 90 top
U26  ATMEGA168  [TQFP32-08]  35.05,108.46 180 top
U27  V_REG_LDOSMD  [SOT23-5]  83.31,118.62 90 top
U28  ATMEGA168  [TQFP32-08]  93.47,108.46 180 top
U29  V_REG_LDOSMD  [SOT23-5]  141.73,118.62 90 top
U30  ATMEGA168  [TQFP32-08]  151.89,108.46 180 top
U31  V_REG_LDOSMD  [SOT23-5]  200.15,118.62 90 top
U32  ATMEGA168  [TQFP32-08]  210.31,108.46 180 top
U$1  LOGO-SFENEW  [SFE-NEW-WEBLOGO]  91.95,12.06 0 top
U$2  AVR_SPI_PRG_6PTH  [2X3]  32.51,31.24 0 top
U$3  FIDUCIAL1X2  [FIDUCIAL-1X2]  74.42,33.78 0 top
U$4  FIDUCIAL1X2  [FIDUCIAL-1X2]  115.06,13.46 0 top
U$5  AVR_SPI_PRG_6PTH  [2X3]  90.93,31.24 0 top
U$6  LOGO-SFENEW  [SFE-NEW-WEBLOGO]  150.37,12.06 0 top
U$7  FIDUCIAL1X2  [FIDUCIAL-1X2]  132.84,33.78 0 top
U$8  LOGO-SFENEW  [SFE-NEW-WEBLOGO]  33.53,12.06 0 top
U$9  FIDUCIAL1X2  [FIDUCIAL-1X2]  16,33.78 0 top
U$10  FIDUCIAL1X2  [FIDUCIAL-1X2]  56.64,13.46 0 top
U$11  FIDUCIAL1X2  [FIDUCIAL-1X2]  173.48,13.46 0 top
U$12  AVR_SPI_PRG_6PTH  [2X3]  149.35,31.24 0 top
U$13  LOGO-SFENEW  [SFE-NEW-WEBLOGO]  208.79,12.06 0 top
U$14  FIDUCIAL1X2  [FIDUCIAL-1X2]  191.26,33.78 0 top
U$15  FIDUCIAL1X2  [FIDUCIAL-1X2]  231.9,13.46 0 top
U$16  AVR_SPI_PRG_6PTH  [2X3]  207.77,31.24 0 top
U$17  LOGO-SFENEW  [SFE-NEW-WEBLOGO]  33.53,40.77 0 top
U$18  FIDUCIAL1X2  [FIDUCIAL-1X2]  16,62.48 0 top
U$19  FIDUCIAL1X2  [FIDUCIAL-1X2]  56.64,42.16 0 top
U$20  AVR_SPI_PRG_6PTH  [2X3]  32.51,59.94 0 top
U$21  LOGO-SFENEW  [SFE-NEW-WEBLOGO]  91.95,40.77 0 top
U$22  FIDUCIAL1X2  [FIDUCIAL-1X2]  74.42,62.48 0 top
U$23  FIDUCIAL1X2  [FIDUCIAL-1X2]  115.06,42.16 0 top
U$24  AVR_SPI_PRG_6PTH  [2X3]  90.93,59.94 0 top
U$25  LOGO-SFENEW  [SFE-NEW-WEBLOGO]  150.37,40.77 0 top
U$26  FIDUCIAL1X2  [FIDUCIAL-1X2]  132.84,62.48 0 top
U$27  FIDUCIAL1X2  [FIDUCIAL-1X2]  173.48,42.16 0 top
U$28  AVR_SPI_PRG_6PTH  [2X3]  149.35,59.94 0 top
U$29  LOGO-SFENEW  [SFE-NEW-WEBLOGO]  208.79,40.77 0 top
U$30  FIDUCIAL1X2  [FIDUCIAL-1X2]  191.26,62.48 0 top
U$31  FIDUCIAL1X2  [FIDUCIAL-1X2]  231.9,42.16 0 top
U$32  AVR_SPI_PRG_6PTH  [2X3]  207.77,59.94 0 top
U$33  LOGO-SFENEW  [SFE-NEW-WEBLOGO]  33.53,69.47 0 top
U$34  FIDUCIAL1X2  [FIDUCIAL-1X2]  16,91.19 0 top
U$35  FIDUCIAL1X2  [FIDUCIAL-1X2]  56.64,70.87 0 top
U$36  AVR_SPI_PRG_6PTH  [2X3]  32.51,88.65 0 top
U$37  LOGO-SFENEW  [SFE-NEW-WEBLOGO]  91.95,69.47 0 top
U$38  FIDUCIAL1X2  [FIDUCIAL-1X2]  74.42,91.19 0 top
U$39  FIDUCIAL1X2  [FIDUCIAL-1X2]  115.06,70.87 0 top
U$40  AVR_SPI_PRG_6PTH  [2X3]  90.93,88.65 0 top
U$41  LOGO-SFENEW  [SFE-NEW-WEBLOGO]  150.37,69.47 0 top
U$42  FIDUCIAL1X2  [FIDUCIAL-1X2]  132.84,91.19 0 top
U$43  FIDUCIAL1X2  [FIDUCIAL-1X2]  173.48,70.87 0 top
U$44  AVR_SPI_PRG_6PTH  [2X3]  149.35,88.65 0 top
U$45  LOGO-SFENEW  [SFE-NEW-WEBLOGO]  208.79,69.47 0 top
U$46  FIDUCIAL1X2  [FIDUCIAL-1X2]  191.26,91.19 0 top
U$47  FIDUCIAL1X2  [FIDUCIAL-1X2]  231.9,70.87 0 top
U$48  AVR_SPI_PRG_6PTH  [2X3]  207.77,88.65 0 top
U$49  LOGO-SFENEW  [SFE-NEW-WEBLOGO]  33.53,98.17 0 top
U$50  FIDUCIAL1X2  [FIDUCIAL-1X2]  16,119.89 0 top
U$51  FIDUCIAL1X2  [FIDUCIAL-1X2]  56.64,99.57 0 top
U$52  AVR_SPI_PRG_6PTH  [2X3]  32.51,117.35 0 top
U$53  LOGO-SFENEW  [SFE-NEW-WEBLOGO]  91.95,98.17 0 top
U$54  FIDUCIAL1X2  [FIDUCIAL-1X2]  74.42,119.89 0 top
U$55  FIDUCIAL1X2  [FIDUCIAL-1X2]  115.06,99.57 0 top
U$56  AVR_SPI_PRG_6PTH  [2X3]  90.93,117.35 0 top
U$57  LOGO-SFENEW  [SFE-NEW-WEBLOGO]  150.37,98.17 0 top
U$58  FIDUCIAL1X2  [FIDUCIAL-1X2]  132.84,119.89 0 top
U$59  FIDUCIAL1X2  [FIDUCIAL-1X2]  173.48,99.57 0 top
U$60  AVR_SPI_PRG_6PTH  [2X3]  149.35,117.35 0 top
U$61  LOGO-SFENEW  [SFE-NEW-WEBLOGO]  208.79,98.17 0 top
U$62  FIDUCIAL1X2  [FIDUCIAL-1X2]  191.26,119.89 0 top
U$63  FIDUCIAL1X2  [FIDUCIAL-1X2]  231.9,99.57 0 top
U$64  AVR_SPI_PRG_6PTH  [2X3]  207.77,117.35 0 top
Y1  RESONATORSMD  [RESONATOR-SMD]  42.67,24.89 90 top
Y2  RESONATORSMD  [RESONATOR-SMD]  101.09,24.89 90 top
Y3  RESONATORSMD  [RESONATOR-SMD]  159.51,24.89 90 top
Y4  RESONATORSMD  [RESONATOR-SMD]  217.93,24.89 90 top
Y5  RESONATORSMD  [RESONATOR-SMD]  42.67,53.59 90 top
Y6  RESONATORSMD  [RESONATOR-SMD]  101.09,53.59 90 top
Y7  RESONATORSMD  [RESONATOR-SMD]  159.51,53.59 90 top
Y8  RESONATORSMD  [RESONATOR-SMD]  217.93,53.59 90 top
Y9  RESONATORSMD  [RESONATOR-SMD]  42.67,82.3 90 top
Y10  RESONATORSMD  [RESONATOR-SMD]  101.09,82.3 90 top
Y11  RESONATORSMD  [RESONATOR-SMD]  159.51,82.3 90 top
Y12  RESONATORSMD  [RESONATOR-SMD]  217.93,82.3 90 top
Y13  RESONATORSMD  [RESONATOR-SMD]  42.67,111 90 top
Y14  RESONATORSMD  [RESONATOR-SMD]  101.09,111 90 top
Y15  RESONATORSMD  [RESONATOR-SMD]  159.51,111 90 top
Y16  RESONATORSMD  [RESONATOR-SMD]  217.93,111 90 top

## Library data of the parts
C1-C48 JP1-JP64 Q1-Q16 R1-R64 SJ1-SJ16 TP1-TP48 U1-U32 U$1-U$64 Y1-Y16 = SparkFun
E$1 = SparkFun-Retired
E$7 E$8 LOGO1-LOGO48 = SparkFun-Aesthetics

## Nets
5V: C1.1 C2.2 C4.A JP3.1 JP4.3 Q1.2 R1.2 R3.3 U1.5 U2.4 U2.6 U2.18 U2.20 U$2.2
5V1: C3.1 C5.2 C6.A JP5.1 JP6.3 Q2.2 R5.2 R6.3 U3.5 U4.4 U4.6 U4.18 U4.20 U$5.2
5V2: C7.1 C8.2 C9.A JP9.1 JP10.3 Q3.2 R9.2 R10.3 U5.5 U6.4 U6.6 U6.18 U6.20 U$12.2
5V3: C10.1 C11.2 C12.A JP13.1 JP14.3 Q4.2 R13.2 R14.3 U7.5 U8.4 U8.6 U8.18 U8.20 U$16.2
5V4: C13.1 C14.2 C15.A JP17.1 JP18.3 Q5.2 R17.2 R18.3 U9.5 U10.4 U10.6 U10.18 U10.20 U$20.2
5V5: C16.1 C17.2 C18.A JP21.1 JP22.3 Q6.2 R21.2 R22.3 U11.5 U12.4 U12.6 U12.18 U12.20 U$24.2
5V6: C19.1 C20.2 C21.A JP25.1 JP26.3 Q7.2 R25.2 R26.3 U13.5 U14.4 U14.6 U14.18 U14.20 U$28.2
5V7: C22.1 C23.2 C24.A JP29.1 JP30.3 Q8.2 R29.2 R30.3 U15.5 U16.4 U16.6 U16.18 U16.20 U$32.2
5V8: C25.1 C26.2 C27.A JP33.1 JP34.3 Q9.2 R33.2 R34.3 U17.5 U18.4 U18.6 U18.18 U18.20 U$36.2
5V9: C28.1 C29.2 C30.A JP37.1 JP38.3 Q10.2 R37.2 R38.3 U19.5 U20.4 U20.6 U20.18 U20.20 U$40.2
5V10: C31.1 C32.2 C33.A JP41.1 JP42.3 Q11.2 R41.2 R42.3 U21.5 U22.4 U22.6 U22.18 U22.20 U$44.2
5V11: C34.1 C35.2 C36.A JP45.1 JP46.3 Q12.2 R45.2 R46.3 U23.5 U24.4 U24.6 U24.18 U24.20 U$48.2
5V12: C37.1 C38.2 C39.A JP49.1 JP50.3 Q13.2 R49.2 R50.3 U25.5 U26.4 U26.6 U26.18 U26.20 U$52.2
5V13: C40.1 C41.2 C42.A JP53.1 JP54.3 Q14.2 R53.2 R54.3 U27.5 U28.4 U28.6 U28.18 U28.20 U$56.2
5V14: C43.1 C44.2 C45.A JP57.1 JP58.3 Q15.2 R57.2 R58.3 U29.5 U30.4 U30.6 U30.18 U30.20 U$60.2
5V15: C46.1 C47.2 C48.A JP61.1 JP62.3 Q16.2 R61.2 R62.3 U31.5 U32.4 U32.6 U32.18 U32.20 U$64.2
A: JP3.19 Q1.3
A1: JP5.19 Q2.3
A2: JP9.19 Q3.3
A3: JP13.19 Q4.3
A4: JP17.19 Q5.3
A5: JP21.19 Q6.3
A6: JP25.19 Q7.3
A7: JP29.19 Q8.3
A8: JP33.19 Q9.3
A9: JP37.19 Q10.3
A10: JP41.19 Q11.3
A11: JP45.19 Q12.3
A12: JP49.19 Q13.3
A13: JP53.19 Q14.3
A14: JP57.19 Q15.3
A15: JP61.19 Q16.3
BL_EN: R2.1 U2.14
BL_EN1: R7.1 U4.14
BL_EN2: R11.1 U6.14
BL_EN3: R15.1 U8.14
BL_EN4: R19.1 U10.14
BL_EN5: R23.1 U12.14
BL_EN6: R27.1 U14.14
BL_EN7: R31.1 U16.14
BL_EN8: R35.1 U18.14
BL_EN9: R39.1 U20.14
BL_EN10: R43.1 U22.14
BL_EN11: R47.1 U24.14
BL_EN12: R51.1 U26.14
BL_EN13: R55.1 U28.14
BL_EN14: R59.1 U30.14
BL_EN15: R63.1 U32.14
CS1: JP3.13 JP4.10 U2.27
CS2: JP3.12 JP4.11 U2.28
CS3: JP5.12 JP6.11 U4.28
CS4: JP5.13 JP6.10 U4.27
CS5: JP9.12 JP10.11 U6.28
CS6: JP9.13 JP10.10 U6.27
CS7: JP13.12 JP14.11 U8.28
CS8: JP13.13 JP14.10 U8.27
CS9: JP17.12 JP18.11 U10.28
CS10: JP17.13 JP18.10 U10.27
CS11: JP21.12 JP22.11 U12.28
CS12: JP21.13 JP22.10 U12.27
CS13: JP25.12 JP26.11 U14.28
CS14: JP25.13 JP26.10 U14.27
CS15: JP29.12 JP30.11 U16.28
CS16: JP29.13 JP30.10 U16.27
CS17: JP33.12 JP34.11 U18.28
CS18: JP33.13 JP34.10 U18.27
CS19: JP37.12 JP38.11 U20.28
CS20: JP37.13 JP38.10 U20.27
CS21: JP41.12 JP42.11 U22.28
CS22: JP41.13 JP42.10 U22.27
CS23: JP45.12 JP46.11 U24.28
CS24: JP45.13 JP46.10 U24.27
CS25: JP49.12 JP50.11 U26.28
CS26: JP49.13 JP50.10 U26.27
CS27: JP53.12 JP54.11 U28.28
CS28: JP53.13 JP54.10 U28.27
CS29: JP57.12 JP58.11 U30.28
CS30: JP57.13 JP58.10 U30.27
CS31: JP61.12 JP62.11 U32.28
CS32: JP61.13 JP62.10 U32.27
D/I: JP3.16 JP4.7 U2.24
D/I1: JP5.16 JP6.7 U4.24
D/I2: JP9.16 JP10.7 U6.24
D/I3: JP13.16 JP14.7 U8.24
D/I4: JP17.16 JP18.7 U10.24
D/I5: JP21.16 JP22.7 U12.24
D/I6: JP25.16 JP26.7 U14.24
D/I7: JP29.16 JP30.7 U16.24
D/I8: JP33.16 JP34.7 U18.24
D/I9: JP37.16 JP38.7 U20.24
D/I10: JP41.16 JP42.7 U22.24
D/I11: JP45.16 JP46.7 U24.24
D/I12: JP49.16 JP50.7 U26.24
D/I13: JP53.16 JP54.7 U28.24
D/I14: JP57.16 JP58.7 U30.24
D/I15: JP61.16 JP62.7 U32.24
DB0: JP3.4 JP4.12 U2.12
DB1: JP3.5 JP4.13 U2.13
DB2: JP3.6 JP4.14 U2.32
DB3: JP3.7 JP4.15 U2.1
DB4: JP3.8 JP4.16 U2.2
DB5: JP3.9 JP4.17 U2.9
DB6: JP3.10 JP4.18 U2.10
DB7: JP3.11 JP4.19 U2.11
DB8: JP5.4 JP6.12 U4.12
DB9: JP5.5 JP6.13 U4.13
DB10: JP5.6 JP6.14 U4.32
DB11: JP5.7 JP6.15 U4.1
DB12: JP5.8 JP6.16 U4.2
DB13: JP5.9 JP6.17 U4.9
DB14: JP5.10 JP6.18 U4.10
DB15: JP5.11 JP6.19 U4.11
DB16: JP9.4 JP10.12 U6.12
DB17: JP9.5 JP10.13 U6.13
DB18: JP9.6 JP10.14 U6.32
DB19: JP9.7 JP10.15 U6.1
DB20: JP9.8 JP10.16 U6.2
DB21: JP9.9 JP10.17 U6.9
DB22: JP9.10 JP10.18 U6.10
DB23: JP9.11 JP10.19 U6.11
DB24: JP13.4 JP14.12 U8.12
DB25: JP13.5 JP14.13 U8.13
DB26: JP13.6 JP14.14 U8.32
DB27: JP13.7 JP14.15 U8.1
DB28: JP13.8 JP14.16 U8.2
DB29: JP13.9 JP14.17 U8.9
DB30: JP13.10 JP14.18 U8.10
DB31: JP13.11 JP14.19 U8.11
DB32: JP17.4 JP18.12 U10.12
DB33: JP17.5 JP18.13 U10.13
DB34: JP17.6 JP18.14 U10.32
DB35: JP17.7 JP18.15 U10.1
DB36: JP17.8 JP18.16 U10.2
DB37: JP17.9 JP18.17 U10.9
DB38: JP17.10 JP18.18 U10.10
DB39: JP17.11 JP18.19 U10.11
DB40: JP21.4 JP22.12 U12.12
DB41: JP21.5 JP22.13 U12.13
DB42: JP21.6 JP22.14 U12.32
DB43: JP21.7 JP22.15 U12.1
DB44: JP21.8 JP22.16 U12.2
DB45: JP21.9 JP22.17 U12.9
DB46: JP21.10 JP22.18 U12.10
DB47: JP21.11 JP22.19 U12.11
DB48: JP25.4 JP26.12 U14.12
DB49: JP25.5 JP26.13 U14.13
DB50: JP25.6 JP26.14 U14.32
DB51: JP25.7 JP26.15 U14.1
DB52: JP25.8 JP26.16 U14.2
DB53: JP25.9 JP26.17 U14.9
DB54: JP25.10 JP26.18 U14.10
DB55: JP25.11 JP26.19 U14.11
DB56: JP29.4 JP30.12 U16.12
DB57: JP29.5 JP30.13 U16.13
DB58: JP29.6 JP30.14 U16.32
DB59: JP29.7 JP30.15 U16.1
DB60: JP29.8 JP30.16 U16.2
DB61: JP29.9 JP30.17 U16.9
DB62: JP29.10 JP30.18 U16.10
DB63: JP29.11 JP30.19 U16.11
DB64: JP33.4 JP34.12 U18.12
DB65: JP33.5 JP34.13 U18.13
DB66: JP33.6 JP34.14 U18.32
DB67: JP33.7 JP34.15 U18.1
DB68: JP33.8 JP34.16 U18.2
DB69: JP33.9 JP34.17 U18.9
DB70: JP33.10 JP34.18 U18.10
DB71: JP33.11 JP34.19 U18.11
DB72: JP37.4 JP38.12 U20.12
DB73: JP37.5 JP38.13 U20.13
DB74: JP37.6 JP38.14 U20.32
DB75: JP37.7 JP38.15 U20.1
DB76: JP37.8 JP38.16 U20.2
DB77: JP37.9 JP38.17 U20.9
DB78: JP37.10 JP38.18 U20.10
DB79: JP37.11 JP38.19 U20.11
DB80: JP41.4 JP42.12 U22.12
DB81: JP41.5 JP42.13 U22.13
DB82: JP41.6 JP42.14 U22.32
DB83: JP41.7 JP42.15 U22.1
DB84: JP41.8 JP42.16 U22.2
DB85: JP41.9 JP42.17 U22.9
DB86: JP41.10 JP42.18 U22.10
DB87: JP41.11 JP42.19 U22.11
DB88: JP45.4 JP46.12 U24.12
DB89: JP45.5 JP46.13 U24.13
DB90: JP45.6 JP46.14 U24.32
DB91: JP45.7 JP46.15 U24.1
DB92: JP45.8 JP46.16 U24.2
DB93: JP45.9 JP46.17 U24.9
DB94: JP45.10 JP46.18 U24.10
DB95: JP45.11 JP46.19 U24.11
DB96: JP49.4 JP50.12 U26.12
DB97: JP49.5 JP50.13 U26.13
DB98: JP49.6 JP50.14 U26.32
DB99: JP49.7 JP50.15 U26.1
DB100: JP49.8 JP50.16 U26.2
DB101: JP49.9 JP50.17 U26.9
DB102: JP49.10 JP50.18 U26.10
DB103: JP49.11 JP50.19 U26.11
DB104: JP53.4 JP54.12 U28.12
DB105: JP53.5 JP54.13 U28.13
DB106: JP53.6 JP54.14 U28.32
DB107: JP53.7 JP54.15 U28.1
DB108: JP53.8 JP54.16 U28.2
DB109: JP53.9 JP54.17 U28.9
DB110: JP53.10 JP54.18 U28.10
DB111: JP53.11 JP54.19 U28.11
DB112: JP57.4 JP58.12 U30.12
DB113: JP57.5 JP58.13 U30.13
DB114: JP57.6 JP58.14 U30.32
DB115: JP57.7 JP58.15 U30.1
DB116: JP57.8 JP58.16 U30.2
DB117: JP57.9 JP58.17 U30.9
DB118: JP57.10 JP58.18 U30.10
DB119: JP57.11 JP58.19 U30.11
DB120: JP61.4 JP62.12 U32.12
DB121: JP61.5 JP62.13 U32.13
DB122: JP61.6 JP62.14 U32.32
DB123: JP61.7 JP62.15 U32.1
DB124: JP61.8 JP62.16 U32.2
DB125: JP61.9 JP62.17 U32.9
DB126: JP61.10 JP62.18 U32.10
DB127: JP61.11 JP62.19 U32.11
EN: JP3.17 JP4.6 U2.23
EN1: JP5.17 JP6.6 U4.23
EN2: JP9.17 JP10.6 U6.23
EN3: JP13.17 JP14.6 U8.23
EN4: JP17.17 JP18.6 U10.23
EN5: JP21.17 JP22.6 U12.23
EN6: JP25.17 JP26.6 U14.23
EN7: JP29.17 JP30.6 U16.23
EN8: JP33.17 JP34.6 U18.23
EN9: JP37.17 JP38.6 U20.23
EN10: JP41.17 JP42.6 U22.23
EN11: JP45.17 JP46.6 U24.23
EN12: JP49.17 JP50.6 U26.23
EN13: JP53.17 JP54.6 U28.23
EN14: JP57.17 JP58.6 U30.23
EN15: JP61.17 JP62.6 U32.23
GND: C1.2 C2.1 C4.C JP1.3 JP2.3 JP3.2 JP3.20 JP4.1 JP4.2 R4.1 U1.2 U2.3 U2.5 U2.21 U$2.6 Y1.2
GND1: C3.2 C5.1 C6.C JP5.2 JP5.20 JP6.1 JP6.2 JP7.3 JP8.3 R8.1 U3.2 U4.3 U4.5 U4.21 U$5.6 Y2.2
GND2: C7.2 C8.1 C9.C JP9.2 JP9.20 JP10.1 JP10.2 JP11.3 JP12.3 R12.1 U5.2 U6.3 U6.5 U6.21 U$12.6 Y3.2
GND3: C10.2 C11.1 C12.C JP13.2 JP13.20 JP14.1 JP14.2 JP15.3 JP16.3 R16.1 U7.2 U8.3 U8.5 U8.21 U$16.6 Y4.2
GND4: C13.2 C14.1 C15.C JP17.2 JP17.20 JP18.1 JP18.2 JP19.3 JP20.3 R20.1 U9.2 U10.3 U10.5 U10.21 U$20.6 Y5.2
GND5: C16.2 C17.1 C18.C JP21.2 JP21.20 JP22.1 JP22.2 JP23.3 JP24.3 R24.1 U11.2 U12.3 U12.5 U12.21 U$24.6 Y6.2
GND6: C19.2 C20.1 C21.C JP25.2 JP25.20 JP26.1 JP26.2 JP27.3 JP28.3 R28.1 U13.2 U14.3 U14.5 U14.21 U$28.6 Y7.2
GND7: C22.2 C23.1 C24.C JP29.2 JP29.20 JP30.1 JP30.2 JP31.3 JP32.3 R32.1 U15.2 U16.3 U16.5 U16.21 U$32.6 Y8.2
GND8: C25.2 C26.1 C27.C JP33.2 JP33.20 JP34.1 JP34.2 JP35.3 JP36.3 R36.1 U17.2 U18.3 U18.5 U18.21 U$36.6 Y9.2
GND9: C28.2 C29.1 C30.C JP37.2 JP37.20 JP38.1 JP38.2 JP39.3 JP40.3 R40.1 U19.2 U20.3 U20.5 U20.21 U$40.6 Y10.2
GND10: C31.2 C32.1 C33.C JP41.2 JP41.20 JP42.1 JP42.2 JP43.3 JP44.3 R44.1 U21.2 U22.3 U22.5 U22.21 U$44.6 Y11.2
GND11: C34.2 C35.1 C36.C JP45.2 JP45.20 JP46.1 JP46.2 JP47.3 JP48.3 R48.1 U23.2 U24.3 U24.5 U24.21 U$48.6 Y12.2
GND12: C37.2 C38.1 C39.C JP49.2 JP49.20 JP50.1 JP50.2 JP51.3 JP52.3 R52.1 U25.2 U26.3 U26.5 U26.21 U$52.6 Y13.2
GND13: C40.2 C41.1 C42.C JP53.2 JP53.20 JP54.1 JP54.2 JP55.3 JP56.3 R56.1 U27.2 U28.3 U28.5 U28.21 U$56.6 Y14.2
GND14: C43.2 C44.1 C45.C JP57.2 JP57.20 JP58.1 JP58.2 JP59.3 JP60.3 R60.1 U29.2 U30.3 U30.5 U30.21 U$60.6 Y15.2
GND15: C46.2 C47.1 C48.C JP61.2 JP61.20 JP62.1 JP62.2 JP63.3 JP64.3 R64.1 U31.2 U32.3 U32.5 U32.21 U$64.6 Y16.2
MISO: U2.16 U$2.1
MISO1: U4.16 U$5.1
MISO2: U6.16 U$12.1
MISO3: U8.16 U$16.1
MISO4: U10.16 U$20.1
MISO5: U12.16 U$24.1
MISO6: U14.16 U$28.1
MISO7: U16.16 U$32.1
MISO8: U18.16 U$36.1
MISO9: U20.16 U$40.1
MISO10: U22.16 U$44.1
MISO11: U24.16 U$48.1
MISO12: U26.16 U$52.1
MISO13: U28.16 U$56.1
MISO14: U30.16 U$60.1
MISO15: U32.16 U$64.1
MOSI: SJ1.2 U2.15 U$2.4
MOSI1: SJ2.2 U4.15 U$5.4
MOSI2: SJ3.2 U6.15 U$12.4
MOSI3: SJ4.2 U8.15 U$16.4
MOSI4: SJ5.2 U10.15 U$20.4
MOSI5: SJ6.2 U12.15 U$24.4
MOSI6: SJ7.2 U14.15 U$28.4
MOSI7: SJ8.2 U16.15 U$32.4
MOSI8: SJ9.2 U18.15 U$36.4
MOSI9: SJ10.2 U20.15 U$40.4
MOSI10: SJ11.2 U22.15 U$44.4
MOSI11: SJ12.2 U24.15 U$48.4
MOSI12: SJ13.2 U26.15 U$52.4
MOSI13: SJ14.2 U28.15 U$56.4
MOSI14: SJ15.2 U30.15 U$60.4
MOSI15: SJ16.2 U32.15 U$64.4
N$1: Q1.1 R2.2
N$2: U2.7 Y1.1
N$3: U2.8 Y1.3
N$4: R4.2 SJ1.1
N$5: Q2.1 R7.2
N$6: U4.7 Y2.1
N$7: U4.8 Y2.3
N$8: R8.2 SJ2.1
N$9: Q3.1 R11.2
N$10: U6.7 Y3.1
N$11: U6.8 Y3.3
N$12: R12.2 SJ3.1
N$13: Q4.1 R15.2
N$14: U8.7 Y4.1
N$15: U8.8 Y4.3
N$16: R16.2 SJ4.1
N$17: Q5.1 R19.2
N$18: U10.7 Y5.1
N$19: U10.8 Y5.3
N$20: R20.2 SJ5.1
N$21: Q6.1 R23.2
N$22: U12.7 Y6.1
N$23: U12.8 Y6.3
N$24: R24.2 SJ6.1
N$25: Q7.1 R27.2
N$26: U14.7 Y7.1
N$27: U14.8 Y7.3
N$28: R28.2 SJ7.1
N$29: Q8.1 R31.2
N$30: U16.7 Y8.1
N$31: U16.8 Y8.3
N$32: R32.2 SJ8.1
N$33: Q9.1 R35.2
N$34: U18.7 Y9.1
N$35: U18.8 Y9.3
N$36: R36.2 SJ9.1
N$37: Q10.1 R39.2
N$38: U20.7 Y10.1
N$39: U20.8 Y10.3
N$40: R40.2 SJ10.1
N$41: Q11.1 R43.2
N$42: U22.7 Y11.1
N$43: U22.8 Y11.3
N$44: R44.2 SJ11.1
N$45: Q12.1 R47.2
N$46: U24.7 Y12.1
N$47: U24.8 Y12.3
N$48: R48.2 SJ12.1
N$49: Q13.1 R51.2
N$50: U26.7 Y13.1
N$51: U26.8 Y13.3
N$52: R52.2 SJ13.1
N$53: Q14.1 R55.2
N$54: U28.7 Y14.1
N$55: U28.8 Y14.3
N$56: R56.2 SJ14.1
N$57: Q15.1 R59.2
N$58: U30.7 Y15.1
N$59: U30.8 Y15.3
N$60: R60.2 SJ15.1
N$61: Q16.1 R63.2
N$62: U32.7 Y16.1
N$63: U32.8 Y16.3
N$64: R64.2 SJ16.1
R/W: JP3.15 JP4.8 U2.25
R/W1: JP5.15 JP6.8 U4.25
R/W2: JP9.15 JP10.8 U6.25
R/W3: JP13.15 JP14.8 U8.25
R/W4: JP17.15 JP18.8 U10.25
R/W5: JP21.15 JP22.8 U12.25
R/W6: JP25.15 JP26.8 U14.25
R/W7: JP29.15 JP30.8 U16.25
R/W8: JP33.15 JP34.8 U18.25
R/W9: JP37.15 JP38.8 U20.25
R/W10: JP41.15 JP42.8 U22.25
R/W11: JP45.15 JP46.8 U24.25
R/W12: JP49.15 JP50.8 U26.25
R/W13: JP53.15 JP54.8 U28.25
R/W14: JP57.15 JP58.8 U30.25
R/W15: JP61.15 JP62.8 U32.25
RESET: JP3.14 JP4.9 U2.26
RESET1: JP5.14 JP6.9 U4.26
RESET2: JP9.14 JP10.9 U6.26
RESET3: JP13.14 JP14.9 U8.26
RESET4: JP17.14 JP18.9 U10.26
RESET5: JP21.14 JP22.9 U12.26
RESET6: JP25.14 JP26.9 U14.26
RESET7: JP29.14 JP30.9 U16.26
RESET8: JP33.14 JP34.9 U18.26
RESET9: JP37.14 JP38.9 U20.26
RESET10: JP41.14 JP42.9 U22.26
RESET11: JP45.14 JP46.9 U24.26
RESET12: JP49.14 JP50.9 U26.26
RESET13: JP53.14 JP54.9 U28.26
RESET14: JP57.14 JP58.9 U30.26
RESET15: JP61.14 JP62.9 U32.26
RST: R1.1 U2.29 U$2.5
RST1: R5.1 U4.29 U$5.5
RST2: R9.1 U6.29 U$12.5
RST3: R13.1 U8.29 U$16.5
RST4: R17.1 U10.29 U$20.5
RST5: R21.1 U12.29 U$24.5
RST6: R25.1 U14.29 U$28.5
RST7: R29.1 U16.29 U$32.5
RST8: R33.1 U18.29 U$36.5
RST9: R37.1 U20.29 U$40.5
RST10: R41.1 U22.29 U$44.5
RST11: R45.1 U24.29 U$48.5
RST12: R49.1 U26.29 U$52.5
RST13: R53.1 U28.29 U$56.5
RST14: R57.1 U30.29 U$60.5
RST15: R61.1 U32.29 U$64.5
RXD: JP1.1 JP2.1 TP1.P$1 U2.30
RXD1: JP7.1 JP8.1 TP4.P$1 U4.30
RXD2: JP11.1 JP12.1 TP7.P$1 U6.30
RXD3: JP15.1 JP16.1 TP10.P$1 U8.30
RXD4: JP19.1 JP20.1 TP13.P$1 U10.30
RXD5: JP23.1 JP24.1 TP16.P$1 U12.30
RXD6: JP27.1 JP28.1 TP19.P$1 U14.30
RXD7: JP31.1 JP32.1 TP22.P$1 U16.30
RXD8: JP35.1 JP36.1 TP25.P$1 U18.30
RXD9: JP39.1 JP40.1 TP28.P$1 U20.30
RXD10: JP43.1 JP44.1 TP31.P$1 U22.30
RXD11: JP47.1 JP48.1 TP34.P$1 U24.30
RXD12: JP51.1 JP52.1 TP37.P$1 U26.30
RXD13: JP55.1 JP56.1 TP40.P$1 U28.30
RXD14: JP59.1 JP60.1 TP43.P$1 U30.30
RXD15: JP63.1 JP64.1 TP46.P$1 U32.30
SCK: U2.17 U$2.3
SCK1: U4.17 U$5.3
SCK2: U6.17 U$12.3
SCK3: U8.17 U$16.3
SCK4: U10.17 U$20.3
SCK5: U12.17 U$24.3
SCK6: U14.17 U$28.3
SCK7: U16.17 U$32.3
SCK8: U18.17 U$36.3
SCK9: U20.17 U$40.3
SCK10: U22.17 U$44.3
SCK11: U24.17 U$48.3
SCK12: U26.17 U$52.3
SCK13: U28.17 U$56.3
SCK14: U30.17 U$60.3
SCK15: U32.17 U$64.3
TXD: JP1.2 JP2.2 TP2.P$1 U2.31
TXD1: JP7.2 JP8.2 TP5.P$1 U4.31
TXD2: JP11.2 JP12.2 TP8.P$1 U6.31
TXD3: JP15.2 JP16.2 TP11.P$1 U8.31
TXD4: JP19.2 JP20.2 TP14.P$1 U10.31
TXD5: JP23.2 JP24.2 TP17.P$1 U12.31
TXD6: JP27.2 JP28.2 TP20.P$1 U14.31
TXD7: JP31.2 JP32.2 TP23.P$1 U16.31
TXD8: JP35.2 JP36.2 TP26.P$1 U18.31
TXD9: JP39.2 JP40.2 TP29.P$1 U20.31
TXD10: JP43.2 JP44.2 TP32.P$1 U22.31
TXD11: JP47.2 JP48.2 TP35.P$1 U24.31
TXD12: JP51.2 JP52.2 TP38.P$1 U26.31
TXD13: JP55.2 JP56.2 TP41.P$1 U28.31
TXD14: JP59.2 JP60.2 TP44.P$1 U30.31
TXD15: JP63.2 JP64.2 TP47.P$1 U32.31
V0: JP3.3 JP4.4 R3.2
V1: JP5.3 JP6.4 R6.2
V2: JP9.3 JP10.4 R10.2
V3: JP13.3 JP14.4 R14.2
V4: JP17.3 JP18.4 R18.2
V5: JP21.3 JP22.4 R22.2
V6: JP25.3 JP26.4 R26.2
V7: JP29.3 JP30.4 R30.2
V8: JP33.3 JP34.4 R34.2
V9: JP37.3 JP38.4 R38.2
V10: JP41.3 JP42.4 R42.2
V11: JP45.3 JP46.4 R46.2
V12: JP49.3 JP50.4 R50.2
V13: JP53.3 JP54.4 R54.2
V14: JP57.3 JP58.4 R58.2
V15: JP61.3 JP62.4 R62.2
VEE: JP3.18 JP4.5 R3.1
VEE1: JP5.18 JP6.5 R6.1
VEE2: JP9.18 JP10.5 R10.1
VEE3: JP13.18 JP14.5 R14.1
VEE4: JP17.18 JP18.5 R18.1
VEE5: JP21.18 JP22.5 R22.1
VEE6: JP25.18 JP26.5 R26.1
VEE7: JP29.18 JP30.5 R30.1
VEE8: JP33.18 JP34.5 R34.1
VEE9: JP37.18 JP38.5 R38.1
VEE10: JP41.18 JP42.5 R42.1
VEE11: JP45.18 JP46.5 R46.1
VEE12: JP49.18 JP50.5 R50.1
VEE13: JP53.18 JP54.5 R54.1
VEE14: JP57.18 JP58.5 R58.1
VEE15: JP61.18 JP62.5 R62.1
VIN: JP1.4 JP2.4 TP3.P$1 U1.1 U1.3
VIN1: JP7.4 JP8.4 TP6.P$1 U3.1 U3.3
VIN2: JP11.4 JP12.4 TP9.P$1 U5.1 U5.3
VIN3: JP15.4 JP16.4 TP12.P$1 U7.1 U7.3
VIN4: JP19.4 JP20.4 TP15.P$1 U9.1 U9.3
VIN5: JP23.4 JP24.4 TP18.P$1 U11.1 U11.3
VIN6: JP27.4 JP28.4 TP21.P$1 U13.1 U13.3
VIN7: JP31.4 JP32.4 TP24.P$1 U15.1 U15.3
VIN8: JP35.4 JP36.4 TP27.P$1 U17.1 U17.3
VIN9: JP39.4 JP40.4 TP30.P$1 U19.1 U19.3
VIN10: JP43.4 JP44.4 TP33.P$1 U21.1 U21.3
VIN11: JP47.4 JP48.4 TP36.P$1 U23.1 U23.3
VIN12: JP51.4 JP52.4 TP39.P$1 U25.1 U25.3
VIN13: JP55.4 JP56.4 TP42.P$1 U27.1 U27.3
VIN14: JP59.4 JP60.4 TP45.P$1 U29.1 U29.3
VIN15: JP63.4 JP64.4 TP48.P$1 U31.1 U31.3

## Tracks (layer width: path | path; a pad name or v marks a point on that pad's centre or on a via)
5V
  Top 0.254: 23.59,31.53 U1.5 | 28.7,23.62 27.43,24.89 25.91,24.89 25.21,25.59 Q1.2 25.26,25.89 25.27,25.91 25.27,27.18 | 23.59,31.53 23.91,31.53 | 40.51,22.35 40.51,23.11 40.08,23.55 U2.6 39.34,23.52 39.37,23.5 37.85,23.5 | 40.51,22.35 41.02,22.35 42.44,20.93 C2.2 42.78,20.93 42.86,20.86 42.86,20.82 43.81,19.86 43.81,13.59 45.21,12.19 52.83,12.19 56.64,8.38 JP3.1 | U2.18 29.43,24.35 28.7,23.62 | 28.7,23.62 29.57,22.75 U2.20 36.85,22.75 37.59,23.5 37.85,23.5 | U$2.2 31.88,33.78 25.27,27.18 | 37.85,23.5 37.85,25.15 38.86,26.16 39.62,26.16 41.13,27.67 R1.2 | U2.4 40.11,21.95 40.51,22.35 | 23.59,31.53 22.38,31.53 21.97,31.11 | JP4.3 16.51,31.24 17.4,32.13 20.95,32.13 21.97,31.11 | 21.97,31.11 21.93,31.08 R3.3 21.93,30.27 22.35,29.84 C4.A | C4.A 20.56,28.83 20.01,28.28 C1.1 | C4.A 23.62,28.83 25.27,27.18
5V1
  Top 0.254: 82.01,31.53 U3.5 | 87.12,23.62 85.85,24.89 84.33,24.89 83.63,25.59 Q2.2 83.68,25.89 83.69,25.91 83.69,27.18 | 82.01,31.53 82.33,31.53 | 98.93,22.35 98.93,23.11 98.5,23.55 U4.6 97.77,23.52 97.79,23.5 96.27,23.5 | 98.93,22.35 99.44,22.35 100.86,20.93 C5.2 101.2,20.93 101.28,20.86 101.28,20.82 102.23,19.86 102.23,13.59 103.63,12.19 111.25,12.19 115.06,8.38 JP5.1 | U4.18 87.85,24.35 87.12,23.62 | 87.12,23.62 87.99,22.75 U4.20 95.27,22.75 96.01,23.5 96.27,23.5 | U$5.2 90.3,33.78 83.69,27.18 | 96.27,23.5 96.27,25.15 97.28,26.16 98.04,26.16 99.55,27.67 R5.2 | U4.4 98.53,21.95 98.93,22.35 | 82.01,31.53 80.8,31.53 80.39,31.11 | JP6.3 74.93,31.24 75.82,32.13 79.38,32.13 80.39,31.11 | 80.39,31.11 80.35,31.08 R6.3 80.35,30.27 80.77,29.84 C6.A | C6.A 78.98,28.83 78.43,28.28 C3.1 | C6.A 82.04,28.83 83.69,27.18
5V2
  Top 0.254: 140.43,31.53 U5.5 | 145.54,23.62 144.27,24.89 142.75,24.89 142.05,25.59 Q3.2 142.1,25.89 142.11,25.91 142.11,27.18 | 140.43,31.53 140.75,31.53 | 157.35,22.35 157.35,23.11 156.91,23.55 U6.6 156.19,23.52 156.21,23.5 154.69,23.5 | 157.35,22.35 157.86,22.35 159.28,20.93 C8.2 159.62,20.93 159.7,20.86 159.7,20.82 160.66,19.86 160.66,13.59 162.05,12.19 169.67,12.19 173.48,8.38 JP9.1 | U6.18 146.27,24.35 145.54,23.62 | 145.54,23.62 146.41,22.75 U6.20 153.69,22.75 154.43,23.5 154.69,23.5 | U$12.2 148.72,33.78 142.11,27.18 | 154.69,23.5 154.69,25.15 155.7,26.16 156.46,26.16 157.97,27.67 R9.2 | U6.4 156.95,21.95 157.35,22.35 | 140.43,31.53 139.22,31.53 138.81,31.11 | JP10.3 133.35,31.24 134.24,32.13 137.79,32.13 138.81,31.11 | 138.81,31.11 138.77,31.08 R10.3 138.77,30.27 139.19,29.84 C9.A | C9.A 137.4,28.83 136.85,28.28 C7.1 | C9.A 140.46,28.83 142.11,27.18
5V3
  Top 0.254: 198.85,31.53 U7.5 | 203.96,23.62 202.69,24.89 201.17,24.89 200.47,25.59 Q4.2 200.52,25.89 200.53,25.91 200.53,27.18 | 198.85,31.53 199.17,31.53 | 215.77,22.35 215.77,23.11 215.34,23.55 U8.6 214.6,23.52 214.63,23.5 213.11,23.5 | 215.77,22.35 216.28,22.35 217.7,20.93 C11.2 218.04,20.93 218.12,20.86 218.12,20.82 219.07,19.86 219.07,13.59 220.47,12.19 228.09,12.19 231.9,8.38 JP13.1 | U8.18 204.69,24.35 203.96,23.62 | 203.96,23.62 204.83,22.75 U8.20 212.11,22.75 212.85,23.5 213.11,23.5 | U$16.2 207.14,33.78 200.53,27.18 | 213.11,23.5 213.11,25.15 214.12,26.16 214.88,26.16 216.39,27.67 R13.2 | U8.4 215.37,21.95 215.77,22.35 | 198.85,31.53 197.64,31.53 197.23,31.11 | JP14.3 191.77,31.24 192.66,32.13 196.22,32.13 197.23,31.11 | 197.23,31.11 197.19,31.08 R14.3 197.19,30.27 197.61,29.84 C12.A | C12.A 195.82,28.83 195.27,28.28 C10.1 | C12.A 198.88,28.83 200.53,27.18
5V4
  Top 0.254: 23.59,60.23 U9.5 | 28.7,52.32 27.43,53.59 25.91,53.59 25.21,54.29 Q5.2 25.26,54.59 25.27,54.61 25.27,55.88 | 23.59,60.23 23.91,60.23 | 40.51,51.05 40.51,51.82 40.08,52.25 U10.6 39.34,52.22 39.37,52.2 37.85,52.2 | 40.51,51.05 41.02,51.05 42.44,49.63 C14.2 42.78,49.63 42.86,49.56 42.86,49.52 43.81,48.56 43.81,42.29 45.21,40.89 52.83,40.89 56.64,37.08 JP17.1 | U10.18 29.43,53.05 28.7,52.32 | 28.7,52.32 29.57,51.45 U10.20 36.85,51.45 37.59,52.2 37.85,52.2 | U$20.2 31.88,62.48 25.27,55.88 | 37.85,52.2 37.85,53.85 38.86,54.86 39.62,54.86 41.13,56.37 R17.2 | U10.4 40.11,50.65 40.51,51.05 | 23.59,60.23 22.38,60.23 21.97,59.82 | JP18.3 16.51,59.94 17.4,60.83 20.95,60.83 21.97,59.82 | 21.97,59.82 21.93,59.78 R18.3 21.93,58.97 22.35,58.55 C15.A | C15.A 20.56,57.53 20.01,56.98 C13.1 | C15.A 23.62,57.53 25.27,55.88
5V5
  Top 0.254: 82.01,60.23 U11.5 | 87.12,52.32 85.85,53.59 84.33,53.59 83.63,54.29 Q6.2 83.68,54.59 83.69,54.61 83.69,55.88 | 82.01,60.23 82.33,60.23 | 98.93,51.05 98.93,51.82 98.5,52.25 U12.6 97.77,52.22 97.79,52.2 96.27,52.2 | 98.93,51.05 99.44,51.05 100.86,49.63 C17.2 101.2,49.63 101.28,49.56 101.28,49.52 102.23,48.56 102.23,42.29 103.63,40.89 111.25,40.89 115.06,37.08 JP21.1 | U12.18 87.85,53.05 87.12,52.32 | 87.12,52.32 87.99,51.45 U12.20 95.27,51.45 96.01,52.2 96.27,52.2 | U$24.2 90.3,62.48 83.69,55.88 | 96.27,52.2 96.27,53.85 97.28,54.86 98.04,54.86 99.55,56.37 R21.2 | U12.4 98.53,50.65 98.93,51.05 | 82.01,60.23 80.8,60.23 80.39,59.82 | JP22.3 74.93,59.94 75.82,60.83 79.38,60.83 80.39,59.82 | 80.39,59.82 80.35,59.78 R22.3 80.35,58.97 80.77,58.55 C18.A | C18.A 78.98,57.53 78.43,56.98 C16.1 | C18.A 82.04,57.53 83.69,55.88
5V6
  Top 0.254: 140.43,60.23 U13.5 | 145.54,52.32 144.27,53.59 142.75,53.59 142.05,54.29 Q7.2 142.1,54.59 142.11,54.61 142.11,55.88 | 140.43,60.23 140.75,60.23 | 157.35,51.05 157.35,51.82 156.91,52.25 U14.6 156.19,52.22 156.21,52.2 154.69,52.2 | 157.35,51.05 157.86,51.05 159.28,49.63 C20.2 159.62,49.63 159.7,49.56 159.7,49.52 160.66,48.56 160.66,42.29 162.05,40.89 169.67,40.89 173.48,37.08 JP25.1 | U14.18 146.27,53.05 145.54,52.32 | 145.54,52.32 146.41,51.45 U14.20 153.69,51.45 154.43,52.2 154.69,52.2 | U$28.2 148.72,62.48 142.11,55.88 | 154.69,52.2 154.69,53.85 155.7,54.86 156.46,54.86 157.97,56.37 R25.2 | U14.4 156.95,50.65 157.35,51.05 | 140.43,60.23 139.22,60.23 138.81,59.82 | JP26.3 133.35,59.94 134.24,60.83 137.79,60.83 138.81,59.82 | 138.81,59.82 138.77,59.78 R26.3 138.77,58.97 139.19,58.55 C21.A | C21.A 137.4,57.53 136.85,56.98 C19.1 | C21.A 140.46,57.53 142.11,55.88
5V7
  Top 0.254: 198.85,60.23 U15.5 | 203.96,52.32 202.69,53.59 201.17,53.59 200.47,54.29 Q8.2 200.52,54.59 200.53,54.61 200.53,55.88 | 198.85,60.23 199.17,60.23 | 215.77,51.05 215.77,51.82 215.34,52.25 U16.6 214.6,52.22 214.63,52.2 213.11,52.2 | 215.77,51.05 216.28,51.05 217.7,49.63 C23.2 218.04,49.63 218.12,49.56 218.12,49.52 219.07,48.56 219.07,42.29 220.47,40.89 228.09,40.89 231.9,37.08 JP29.1 | U16.18 204.69,53.05 203.96,52.32 | 203.96,52.32 204.83,51.45 U16.20 212.11,51.45 212.85,52.2 213.11,52.2 | U$32.2 207.14,62.48 200.53,55.88 | 213.11,52.2 213.11,53.85 214.12,54.86 214.88,54.86 216.39,56.37 R29.2 | U16.4 215.37,50.65 215.77,51.05 | 198.85,60.23 197.64,60.23 197.23,59.82 | JP30.3 191.77,59.94 192.66,60.83 196.22,60.83 197.23,59.82 | 197.23,59.82 197.19,59.78 R30.3 197.19,58.97 197.61,58.55 C24.A | C24.A 195.82,57.53 195.27,56.98 C22.1 | C24.A 198.88,57.53 200.53,55.88
5V8
  Top 0.254: 23.59,88.93 U17.5 | 28.7,81.03 27.43,82.3 25.91,82.3 25.21,82.99 Q9.2 25.26,83.3 25.27,83.31 25.27,84.58 | 23.59,88.93 23.91,88.93 | 40.51,79.76 40.51,80.52 40.08,80.96 U18.6 39.34,80.92 39.37,80.9 37.85,80.9 | 40.51,79.76 41.02,79.76 42.44,78.34 C26.2 42.78,78.34 42.86,78.26 42.86,78.22 43.81,77.26 43.81,70.99 45.21,69.6 52.83,69.6 56.64,65.79 JP33.1 | U18.18 29.43,81.76 28.7,81.03 | 28.7,81.03 29.57,80.16 U18.20 36.85,80.16 37.59,80.9 37.85,80.9 | U$36.2 31.88,91.19 25.27,84.58 | 37.85,80.9 37.85,82.55 38.86,83.57 39.62,83.57 41.13,85.07 R33.2 | U18.4 40.11,79.36 40.51,79.76 | 23.59,88.93 22.38,88.93 21.97,88.52 | JP34.3 16.51,88.65 17.4,89.53 20.95,89.53 21.97,88.52 | 21.97,88.52 R34.3 21.93,87.67 22.35,87.25 C27.A | C27.A 20.56,86.23 20.01,85.69 C25.1 | C27.A 23.62,86.24 25.27,84.58
5V9
  Top 0.254: 82.01,88.93 U19.5 | 87.12,81.03 85.85,82.3 84.33,82.3 83.63,82.99 Q10.2 83.68,83.3 83.69,83.31 83.69,84.58 | 82.01,88.93 82.33,88.93 | 98.93,79.76 98.93,80.52 98.5,80.96 U20.6 97.77,80.92 97.79,80.9 96.27,80.9 | 98.93,79.76 99.44,79.76 100.86,78.34 C29.2 101.2,78.34 101.28,78.26 101.28,78.22 102.23,77.26 102.23,70.99 103.63,69.6 111.25,69.6 115.06,65.79 JP37.1 | U20.18 87.85,81.76 87.12,81.03 | 87.12,81.03 87.99,80.16 U20.20 95.27,80.16 96.01,80.9 96.27,80.9 | U$40.2 90.3,91.19 83.69,84.58 | 96.27,80.9 96.27,82.55 97.28,83.57 98.04,83.57 99.55,85.07 R37.2 | U20.4 98.53,79.36 98.93,79.76 | 82.01,88.93 80.8,88.93 80.39,88.52 | JP38.3 74.93,88.65 75.82,89.53 79.38,89.53 80.39,88.52 | 80.39,88.52 R38.3 80.35,87.67 80.77,87.25 C30.A | C30.A 78.98,86.23 78.43,85.69 C28.1 | C30.A 82.04,86.24 83.69,84.58
5V10
  Top 0.254: 140.43,88.93 U21.5 | 145.54,81.03 144.27,82.3 142.75,82.3 142.05,82.99 Q11.2 142.1,83.3 142.11,83.31 142.11,84.58 | 140.43,88.93 140.75,88.93 | 157.35,79.76 157.35,80.52 156.91,80.96 U22.6 156.19,80.92 156.21,80.9 154.69,80.9 | 157.35,79.76 157.86,79.76 159.28,78.34 C32.2 159.62,78.34 159.7,78.26 159.7,78.22 160.66,77.26 160.66,70.99 162.05,69.6 169.67,69.6 173.48,65.79 JP41.1 | U22.18 146.27,81.76 145.54,81.03 | 145.54,81.03 146.41,80.16 U22.20 153.69,80.16 154.43,80.9 154.69,80.9 | U$44.2 148.72,91.19 142.11,84.58 | 154.69,80.9 154.69,82.55 155.7,83.57 156.46,83.57 157.97,85.07 R41.2 | U22.4 156.95,79.36 157.35,79.76 | 140.43,88.93 139.22,88.93 138.81,88.52 | JP42.3 133.35,88.65 134.24,89.53 137.79,89.53 138.81,88.52 | 138.81,88.52 R42.3 138.77,87.67 139.19,87.25 C33.A | C33.A 137.4,86.23 136.85,85.69 C31.1 | C33.A 140.46,86.24 142.11,84.58
5V11
  Top 0.254: 198.85,88.93 U23.5 | 203.96,81.03 202.69,82.3 201.17,82.3 200.47,82.99 Q12.2 200.52,83.3 200.53,83.31 200.53,84.58 | 198.85,88.93 199.17,88.93 | 215.77,79.76 215.77,80.52 215.34,80.96 U24.6 214.6,80.92 214.63,80.9 213.11,80.9 | 215.77,79.76 216.28,79.76 217.7,78.34 C35.2 218.04,78.34 218.12,78.26 218.12,78.22 219.07,77.26 219.07,70.99 220.47,69.6 228.09,69.6 231.9,65.79 JP45.1 | U24.18 204.69,81.76 203.96,81.03 | 203.96,81.03 204.83,80.16 U24.20 212.11,80.16 212.85,80.9 213.11,80.9 | U$48.2 207.14,91.19 200.53,84.58 | 213.11,80.9 213.11,82.55 214.12,83.57 214.88,83.57 216.39,85.07 R45.2 | U24.4 215.37,79.36 215.77,79.76 | 198.85,88.93 197.64,88.93 197.23,88.52 | JP46.3 191.77,88.65 192.66,89.53 196.22,89.53 197.23,88.52 | 197.23,88.52 R46.3 197.19,87.67 197.61,87.25 C36.A | C36.A 195.82,86.23 195.27,85.69 C34.1 | C36.A 198.88,86.24 200.53,84.58
5V12